# Altium PCB car_template 2021V3.PcbDoc (part 1 of 2)
Units mm, origin at the board's own origin, x right, y up, seen from the top; angles counter-clockwise.
Board outline 64 x 85 mm, 4 copper layers (Top Side, Ground Plane, Power Plane, Bottom Side), stack 0.844 mm thick; 89 components, 78 nets, 327 pads, 91 vias.
Unrouted connection lines stored in the file: 10.
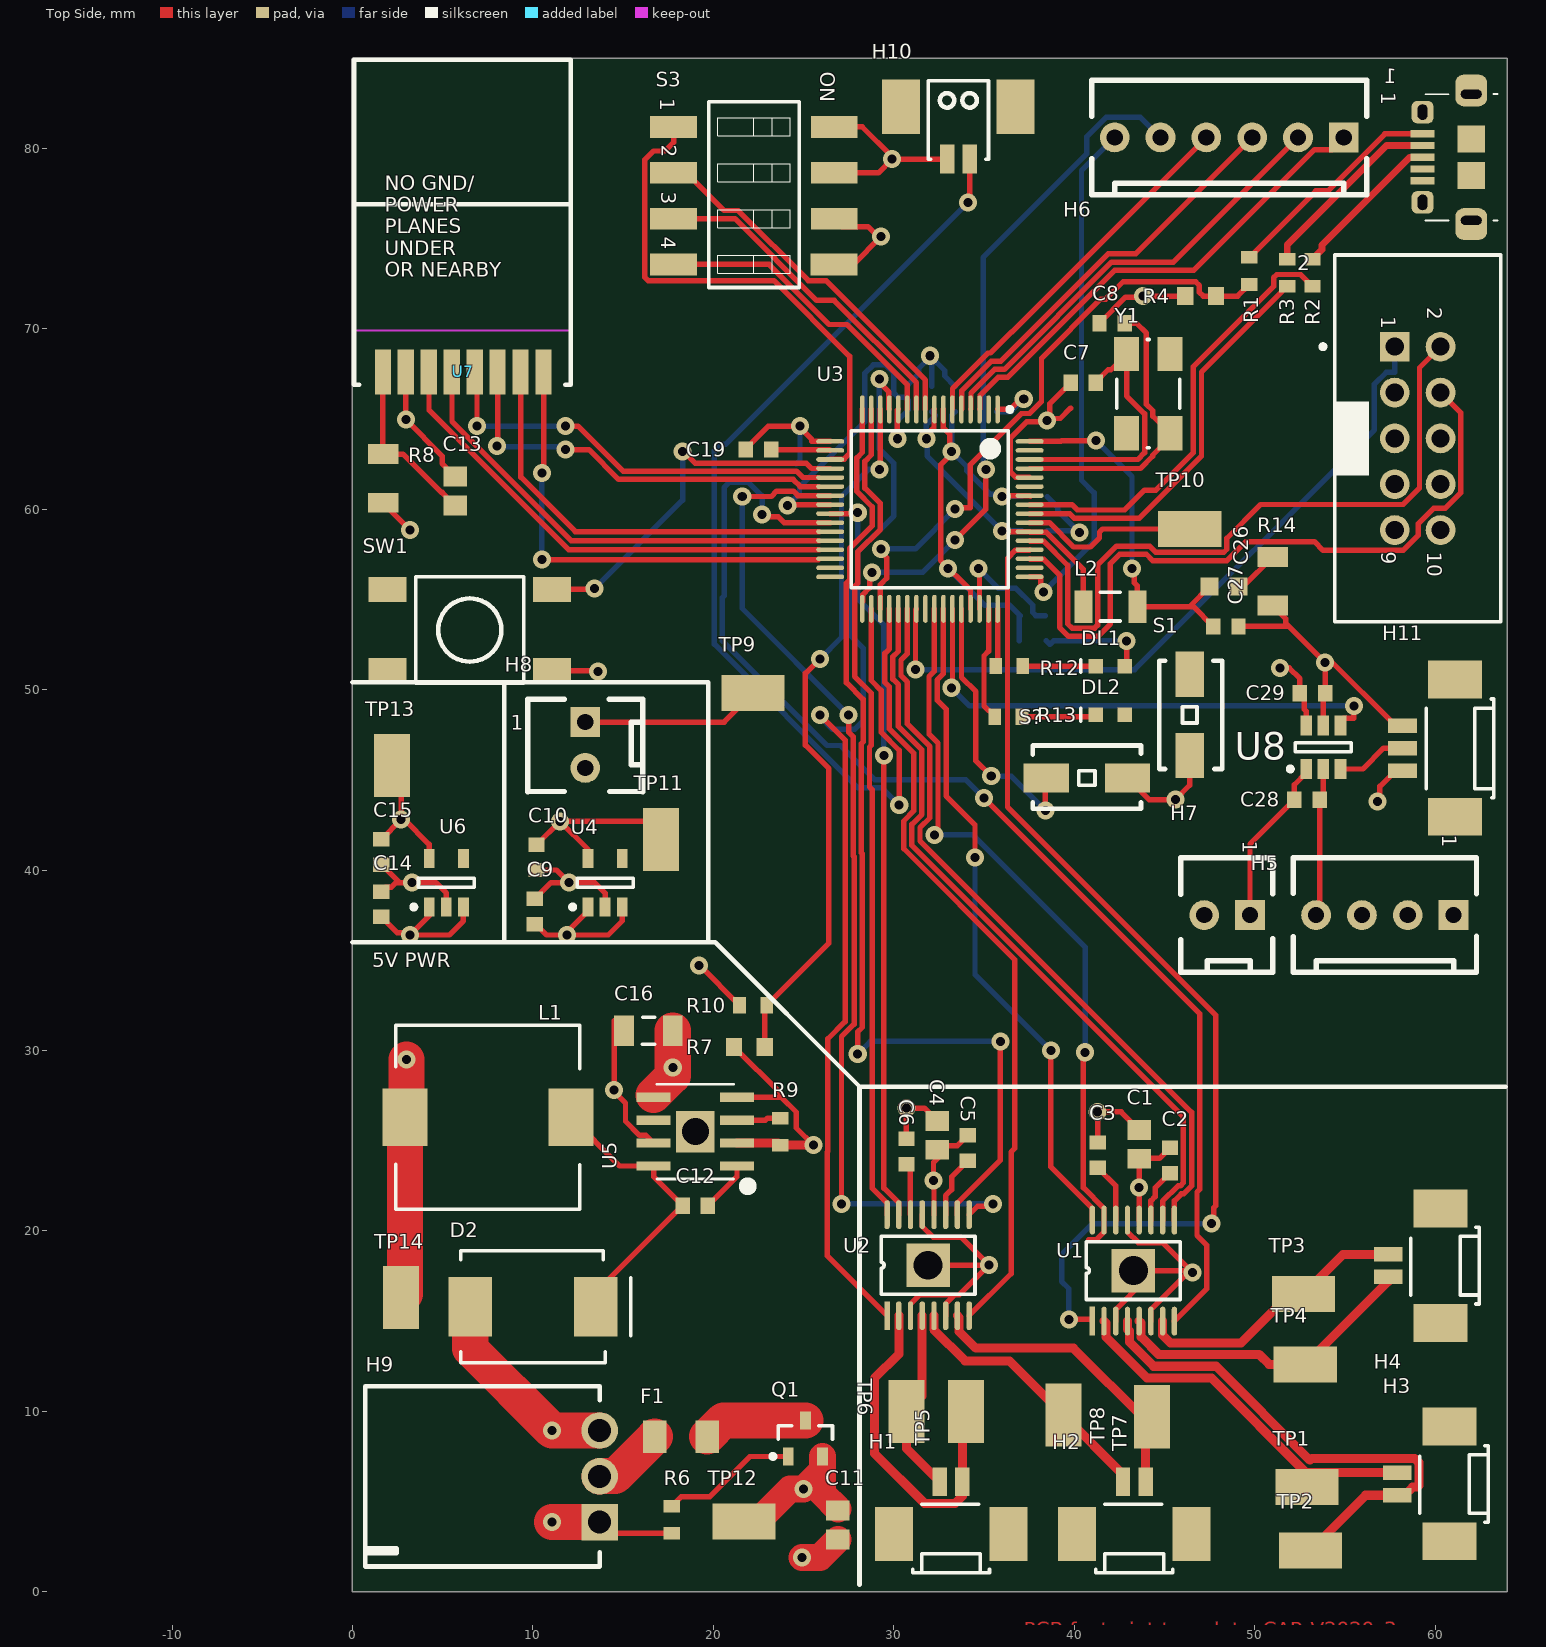
[diagram p0: Top Side view]
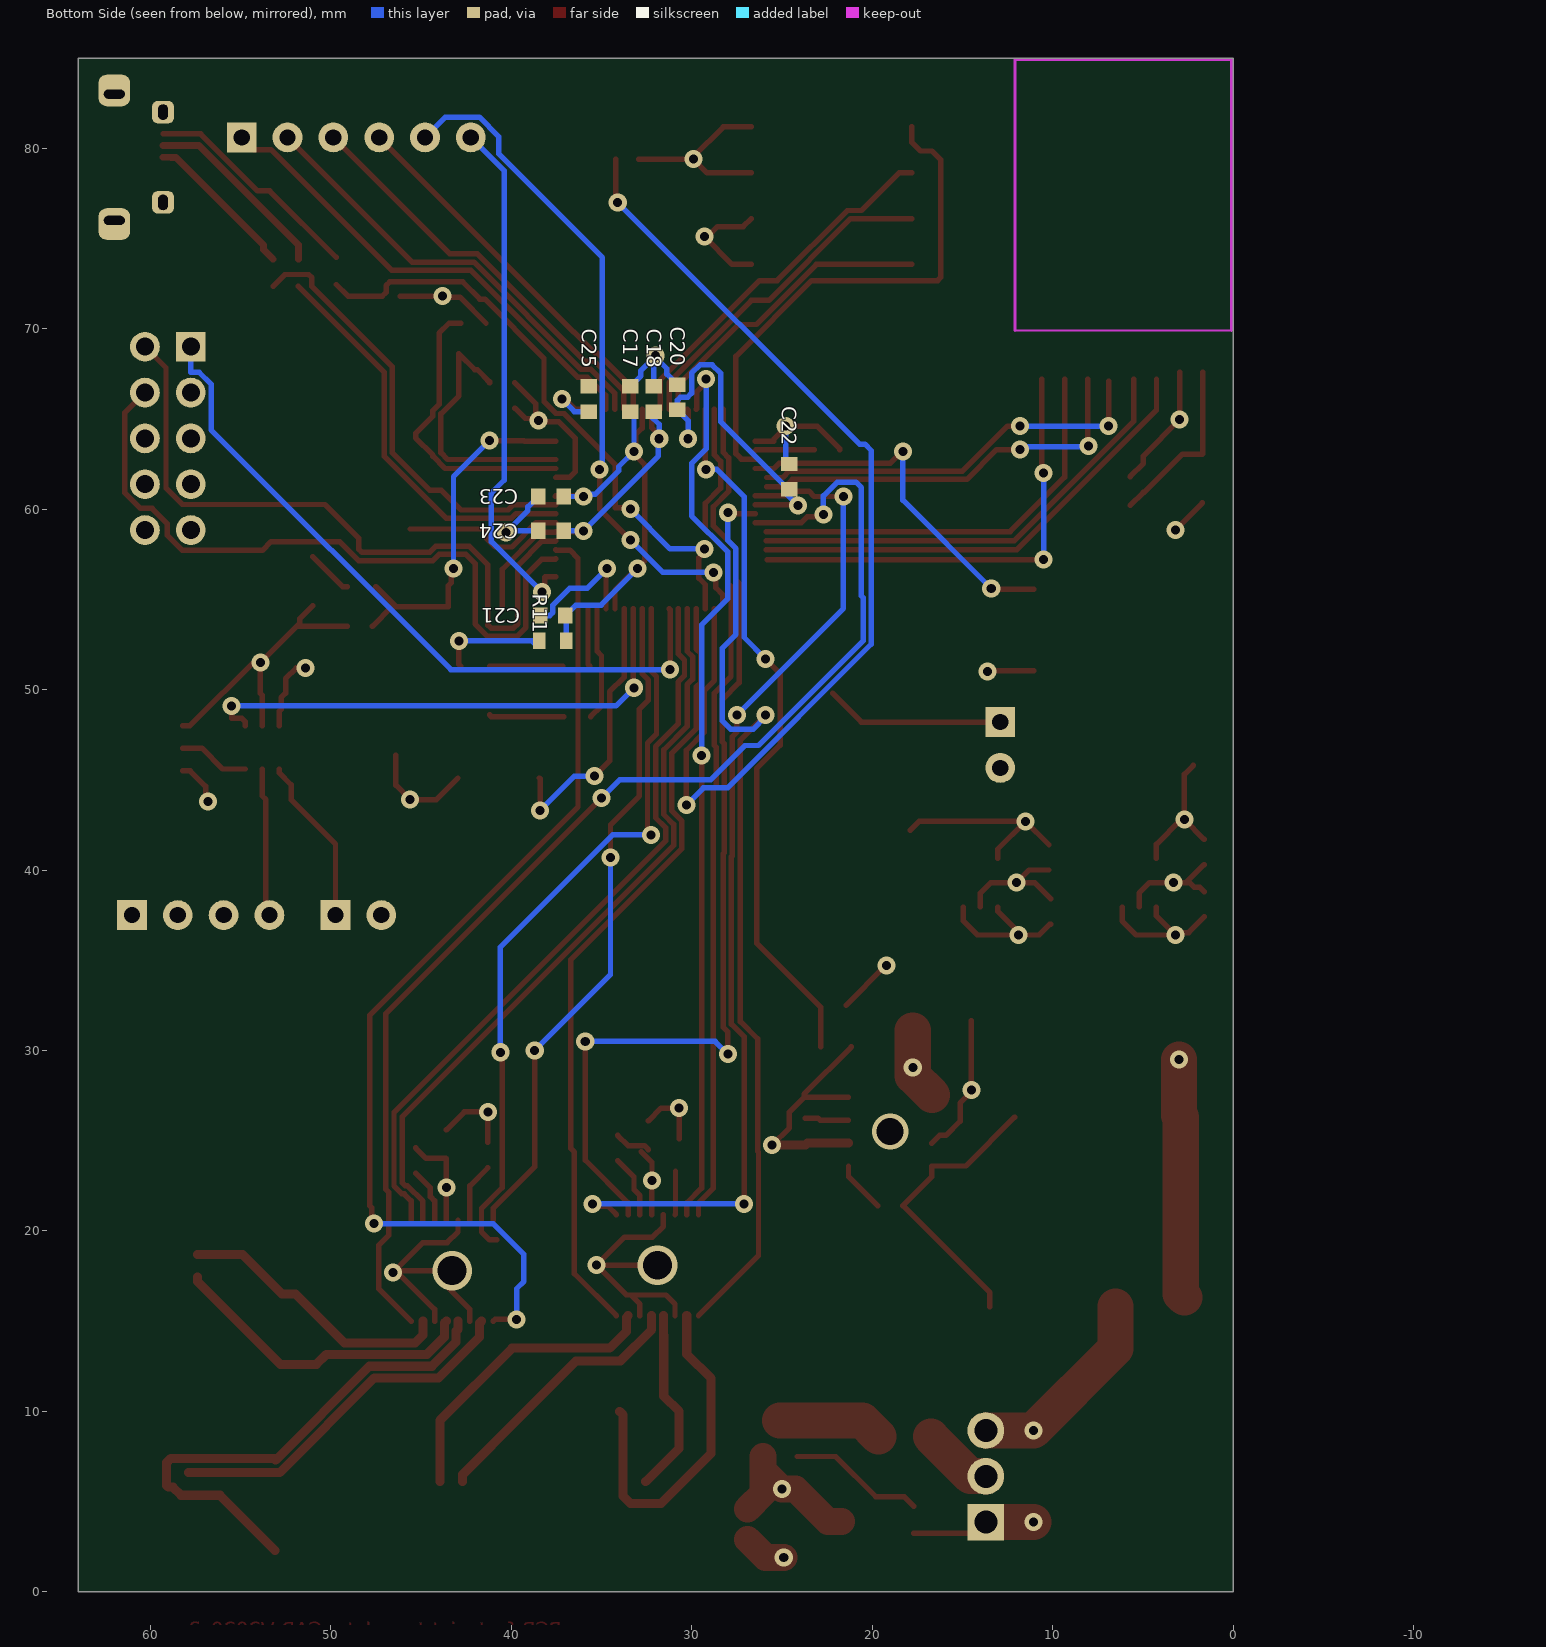
[diagram p1: Bottom Side view, seen from below]
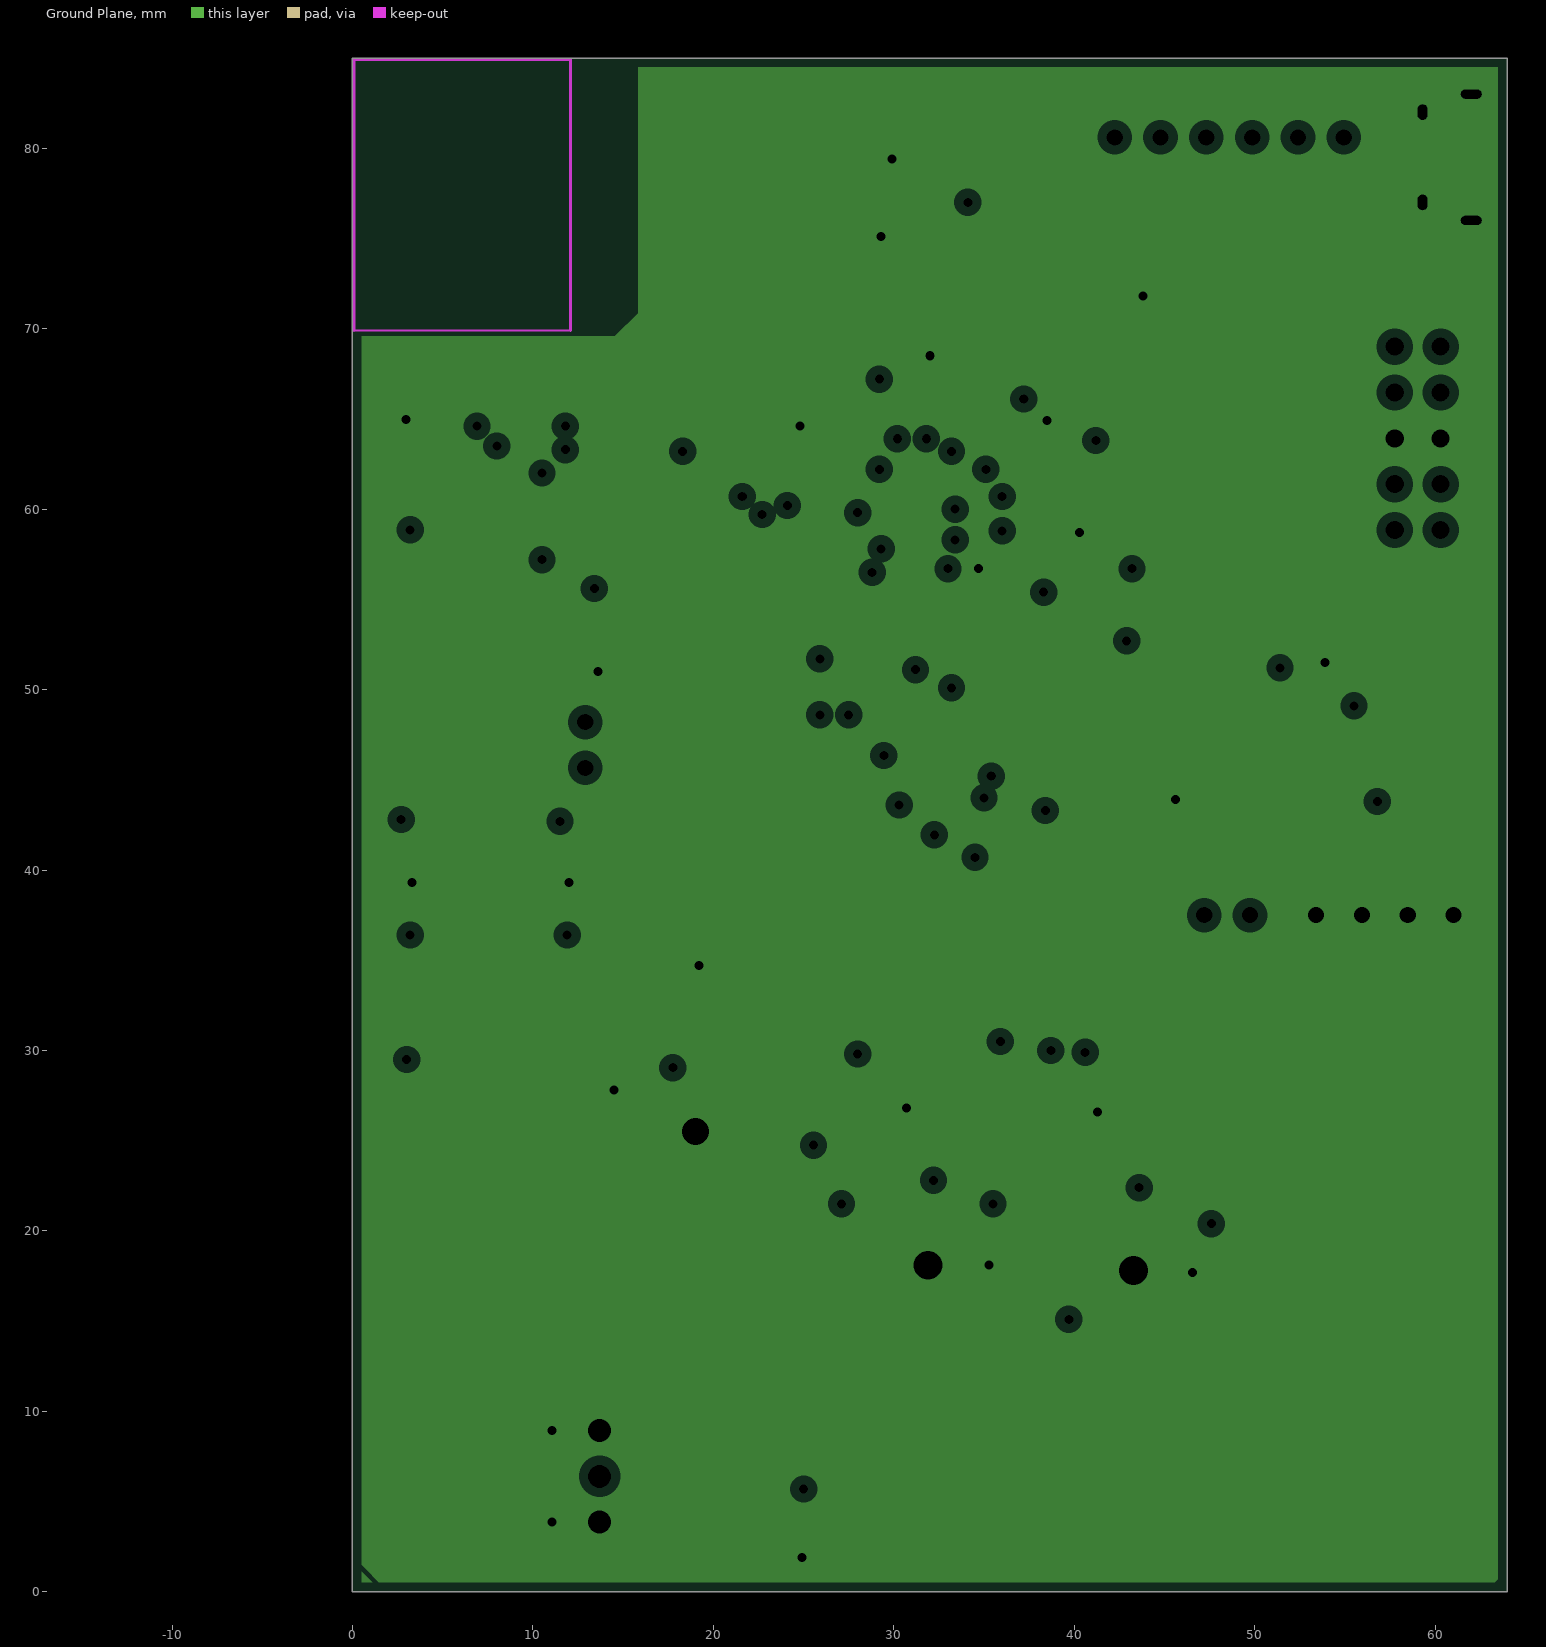
[diagram p2: Ground Plane, clearances drawn from the general rule]
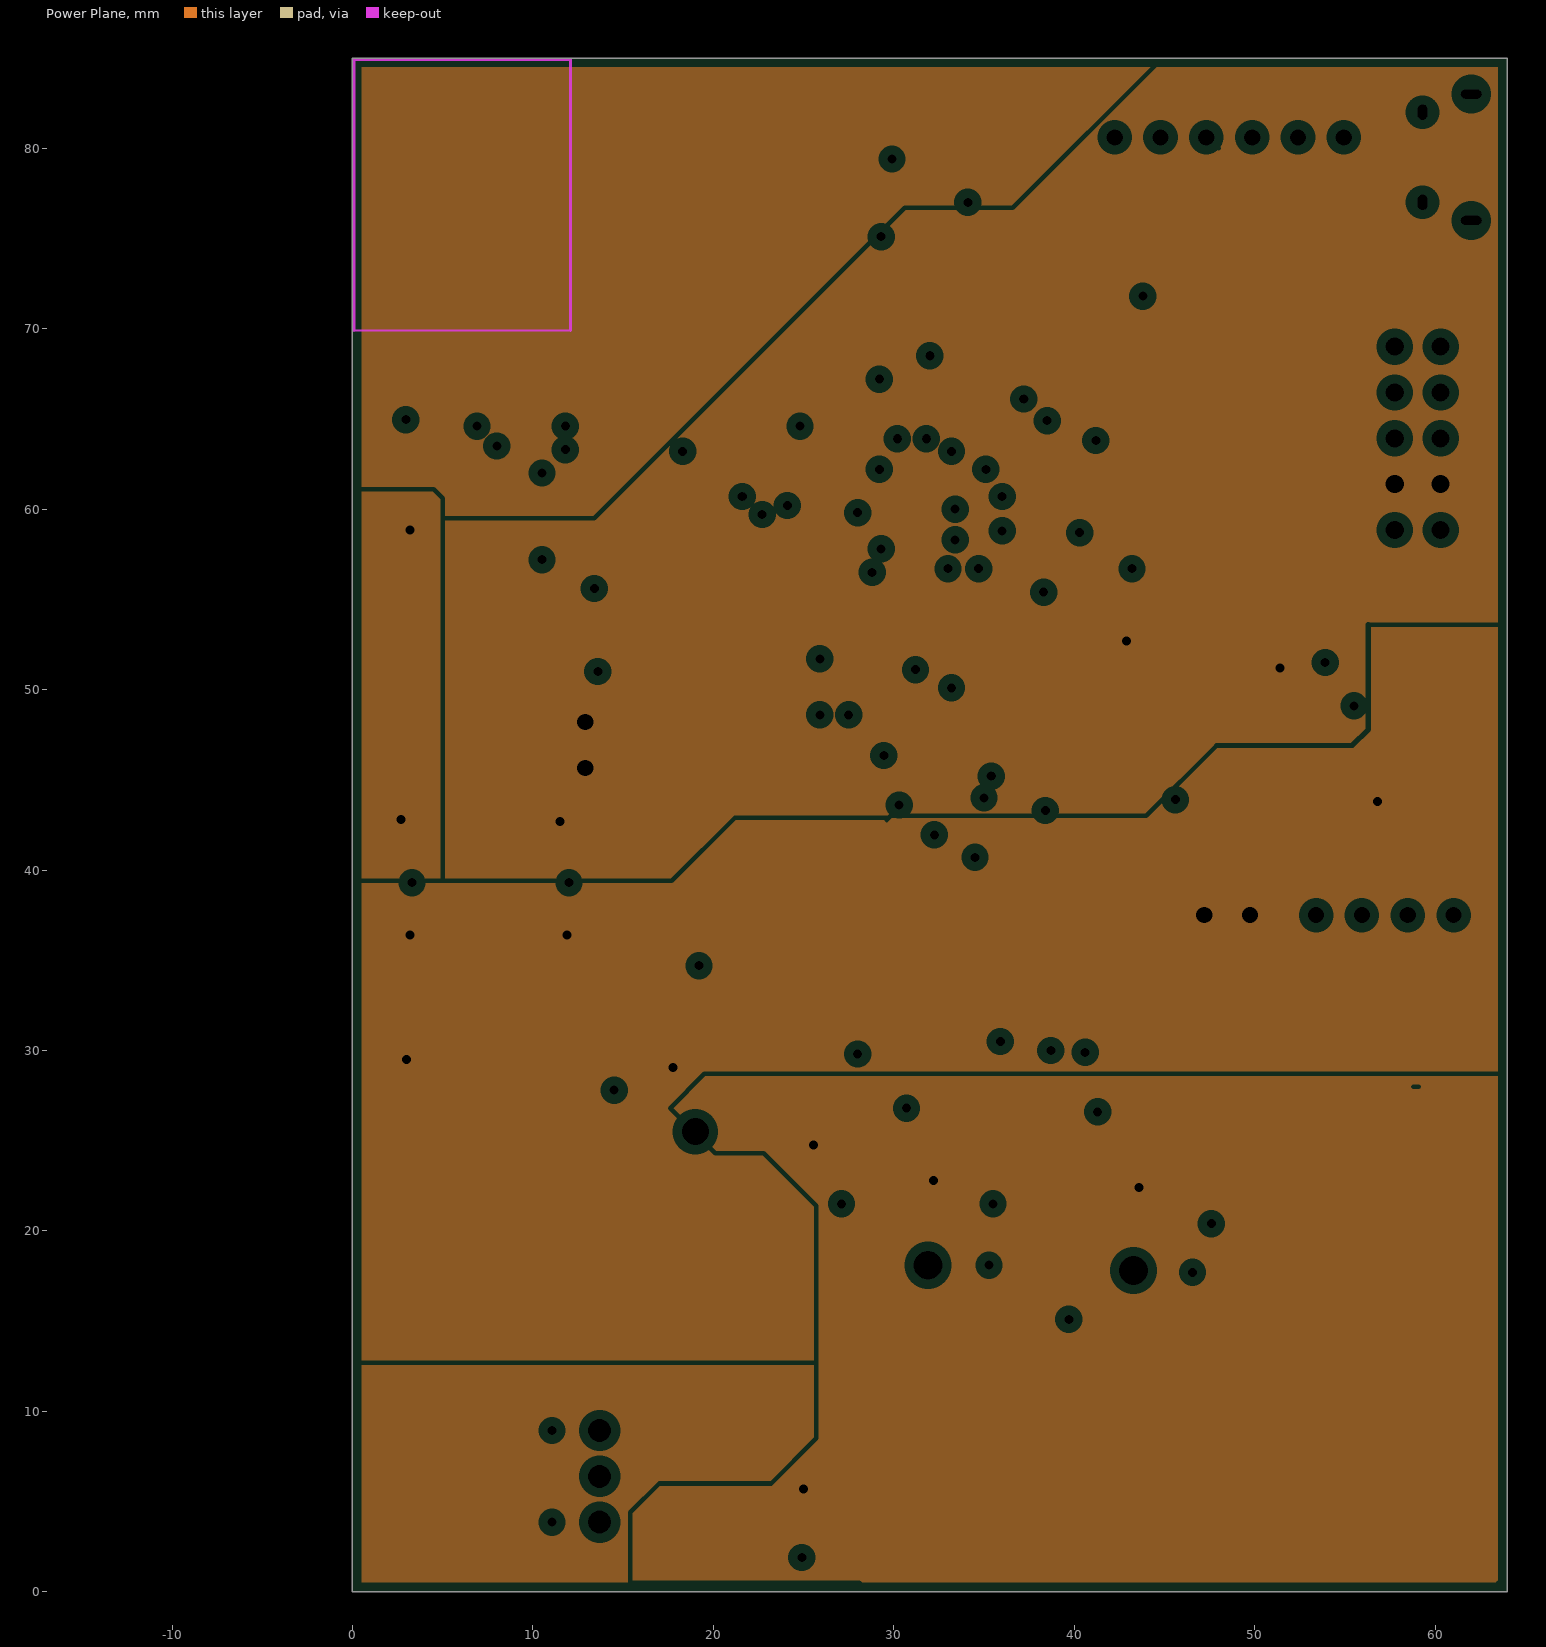
[diagram p3: Power Plane, clearances drawn from the general rule]

## Layer stack, top to bottom
Top Solder: solder mask 0.0102, Solder Resist, Dk 3.5
Top Side: signal copper 0.0356
Dielectric 1: core 0.32, FR-4, Dk 4.8
Ground Plane: plane copper 0.036, net GND
Dielectric 3: prepreg 0.127, Dk 4.2
Power Plane: plane copper 0.036, net (Multiple Nets)
Dielectric 4: core 0.254, Dk 4.2
Bottom Side: signal copper 0.0356
Bottom Solder: solder mask 0.0102, Solder Resist, Dk 3.5

## Board outline
0,85 64,85 64,0 0,0 0,85

## Design rules (kind name [scope] priority, off if disabled: settings)
BoardOutlineClearance [All] p1: gap=0.5 ignorepadtopadclearanceinfootprint=FALSE
Clearance Min_Clearance_Circuit_Labs [All] p1: gap=0.15 ignorepadtopadclearanceinfootprint=FALSE except(0: Arc-Hole Track-Hole SMDPad-Hole THPad-Hole Via-Hole Fill-Hole Poly-Hole Region-Hole Text-Hole)
DiffPairsRouting [All] p1: maxlimit=0.254 minlimit=0.254 mostfreqgap=0.254 toplayer_minwidth=0.381 toplayer_maxwidth=0.381 toplayer_prefwidth=0.381 bottomlayer_minwidth=0.381 bottomlayer_maxwidth=0.381 bottomlayer_prefwidth=0.381 maxuncoupledlength=12.7
FanoutControl Fanout_BGA [IsBGA] p1 off: bgadir=Out bgaviamode=Centered fanoutstyle=Auto fanoutdirection=Alternating viagrid=0.025 // Fanout_BGA (Default Rule)
HoleSize [All] p1: absolutevalues=TRUE maxlimit=10 minlimit=0.3 maxpercent=80.000 minpercent=20.000
MinimumAnnularRing [All] p1: minimumring=0.1
MinimumSolderMaskSliver [All] p1: minsoldermaskwidth=0.1
NetAntennae [All] p1: netantennaetolerance=1
PasteMaskExpansion [All] p1 off: expansion=0.2
PlaneClearance [All] p1: clearance=0.508
PlaneConnect [All] p1: planeconnectstyle=Relief reliefexpansion=0.508 reliefentries=4 reliefconductorwidth=0.254 reliefairgap=0.254
PolygonConnect [All] p1: connectstyle=Relief reliefconductorwidth=0.254 reliefentries=4 polygonreliefangle="90 Angle" airgapwidth=0.254
RoutingVias [All] p1: holewidth=0.5 width=1 viastyle="Through Hole" minholewidth=0.3 minwidth=0.6 maxholewidth=1 maxwidth=2
SMDNeckDown [All] p1 off: percent=50.000
SMDToCorner [All] p1: distance=98425
SMDToPlane [All] p1: distance=1968504
SilkToSolderMaskClearance SilkscreenOverComponentPads [IsPad] p1: minsilkscreentomaskgap=0.254 clearancetoexposedcopper=TRUE
SolderMaskExpansion [All] p1: expansion=0.102
ViasUnderSMD [All] p1: allowed=FALSE
Width [All] p1: maxlimit=2 minlimit=0.15 preferedwidth=0.3
21 further rules are at their usual default settings.

## Classes and differential pairs
component class MotorDriver: C1 C2 C3 C4 C5 C6 H1 H2 H3 H4 TP1 TP2 TP3 TP4 TP5 TP6 TP7 TP8 U1 U2
component class Racer: 1 2 C7 C8 C9 C10 C11 C12 C13 C14 C15 C16 C17 C18 C19 C20 C21 C22 C23 C24 C25 C26 C27 C28 C29 D2 DL1 DL2 F1 H5 H6 H7 H8 H10 H11 L1 L2 Q1 R1 R2 R3 R4 R6 R7 R8 R9 R10 R11 R12 R13 R14 S1 S3 S? SW1 TP9 TP10 TP11 TP12 TP13 TP14 U3 U4 U5 U6 U7 U8 Y1
differential pair D: +D_P -D_N

## Components (designator, comment, footprint, x,y, rotation, side; value= is the part's Value field where it differs from the comment)
1 "JS_USB_MICRO_B" FCI_USB_10118194-0001LF 63.45,79.5 r270 top
2 "Header 5X2 Vert" IDC2.54-V10D 59.03,63.92 r270 top
C1 "10uF" CAPC2012L 43.6,24.8 r270 top
C2 "10nF" CAPC1608L 45.3,23.9 r90 top
C3 "2.2uF" CAPC1608L 41.3,24.2 r270 top
C4 "10uF" CAPC2012L 32.4,25.3 r270 top
C5 "10nF" CAPC1608L 34.1,24.6 r90 top
C6 "2.2uF" CAPC1608L 30.7,24.4 r270 top
C7 "27pF" CAPC1608L 40.5,67 r0 top
C8 "27pF" CAPC1608L 42.1,70.3 r0 top
C9 "1uF" CAPC1608L 10.1,37.7 r270 top
C10 "1uF" CAPC1608L 10.2,40.7 r90 top
C11 "10uF" CAPC2012L 26.9,3.7 r90 top
C12 "100nF" CAPC1608L 19,21.4 r180 top
C13 "10uF" CAPC2012L 5.7,61 r270 top
C14 "1uF" CAPC1608L 1.6,38.1 r270 top
C15 "1uF" CAPC1608L 1.6,41 r90 top
C16 "47uF" CAPC3216L 16.4,31.1 r0 top
C17 "100nF" CAPC1608L 33.4,66.1 r270 bottom
C18 "100nF" CAPC1608L 32.1,66.1 r90 bottom
C19 "100nF" CAPC1608L 22.5,63.3 r0 top
C20 "100nF" CAPC1608L 30.8,66.2 r90 bottom
C21 "100nF" CAPC1608L 37.7,54.1 r180 bottom
C22 "100nF" CAPC1608L 24.6,61.8 r90 bottom
C23 "100nF" CAPC1608L 37.8,60.7 r180 bottom
C24 "100nF" CAPC1608L 37.8,58.8 r0 bottom
C25 "100nF" CAPC1608L 35.7,66.1 r270 bottom
C26 "4.7uF" CAPC1608N 48.3,55.7 r0 top
C27 "100nF" CAPC1608L 48.4,53.5 r180 top
C28 "100nF" CAPC1608L 52.9,43.9 r0 top
C29 "100nF" CAPC1608L 53.2,49.8 r0 top
D2 "SCHOTTKY 30V 4A" SMC 10,15.8 r0 top
DL1 "Bright Green" WL-SMCW0603 41.2,51.3 r0 top
DL2 "Blue" WL-SMCW0603 41.2,48.6 r0 top
F1 "5A" RESC3216N 18.2,8.6 r180 top
H1 "SMD 1.25mm Horiz" SD-53261-0219 32.55,6.1 r180 top
H2 "SMD 1.25mm Horiz" SD-53261-0219 42.7,6.1 r180 top
H3 "SMD 1.25mm Horiz" SD-53261-0219 57.9,5.35 r270 top
H4 "SMD 1.25mm Horiz" SD-53261-0219 57.4,17.45 r270 top
H5 "4 Pin Molex KK Hdr" MOLEX_KK_4_HDR 61.02,37.5 r180 top
H6 "6 Pin Molex KK Hdr" MOLEX_KK_6_HDR 54.94,80.6 r180 top
H7 "2 Pin Molex KK HDR" MOLEX_KK_2_HDR 49.74,37.5 r180 top
H8 "2 Pin Molex KK HDR" MOLEX_KK_2_HDR 12.9,48.2 r270 top
H9 "Battery_HEADER_3pin" BATT_HEADER_3POS 13.7,6.4 r90 top
H10 "SMD Vert 1.25mm" SD-53398-0219 34.2,79.4 r0 top
H11 "SMD Horiz 1.25mm" SD-53261-0319 58.2,45.5 r270 top
L1 "IND 5.2UH 6A" INDUCTOR5u2 7.5,26.3 r180 top
L2 "1A max, Idc 0.3R," INDC3216L 42,54.6 r180 top
Q1 "SSM3J328R,LF" SOT23_L 25.1,8.5 r90 top
R1 "27K" RESC1608L 49.7,73.2 r90 top
R2 "27R" RESC1608L 53.2,73.1 r270 top
R3 "27R" RESC1608L 51.8,73.1 r270 top
R4 "47K" RESC1608N 47,71.8 r0 top
R6 "100K" RESC1608L 17.7,4 r90 top
R7 "47K" RESC1608N 22,30.2 r0 top
R8 "1R" RESC3216L 1.7,61.7 r270 top
R9 "100K" RESC1608L 23.7,25.5 r270 top
R10 "33K" RESC1608L 22.2,32.5 r180 top
R11 "0R" RESC1608L 37.7,52.7 r0 bottom
R12 "330R" RESC1608L 36.4,51.3 r180 top
R13 "330R" RESC1608L 36.35,48.5 r180 top
R14 "1R" RESC3216L 51,56 r270 top
S1 "EVQPNF05M" EVQPNF05M 46.4,48.6 r270 top
S3 "WS_SW DIP-4" "DIP_SW_4WAY_SMD -" 17.8,81.18 r270 top
S? "EVQPNF05M" EVQPNF05M 40.7,45.1 r0 top
SW1 "FSM2JSMATR" FSM2JSMA 6.5,53.3 r90 top
TP1 "A_OUT1" TP_1206 52.9,5.8 r180 top value=TP
TP2 "A_OUT2" TP_1206 53.1,2.3 r180 top value=TP
TP3 "B_OUT1" TP_1206 52.7,16.5 r180 top value=TP
TP4 "B_OUT2" TP_1206 52.8,12.6 r180 top value=TP
TP5 "R_OUT2" TP_1206 34,10 r90 top value=TP
TP6 "R_OUT1" TP_1206 30.7,10 r270 top value=TP
TP7 "L_OUT1" TP_1206 44.3,9.7 r90 top value=TP
TP8 "L_OUT2" TP_1206 39.4,9.8 r90 top value=TP
TP9 "3V3" TP_1206 22.2,49.8 r0 top value=TP
TP10 "Erase" TP_1206 46.4,58.9 r180 top value=TP
TP11 "TP" TP_1206 17.1,41.7 r90 top
TP12 "TP" TP_1206 21.7,3.9 r180 top
TP13 "TP" TP_1206 2.2,45.8 r90 top
TP14 "TP" TP_1206 2.7,16.3 r90 top
U1 "DRV8833" HTSOP16#1 41,15 r90 top locked
U2 "DRV8833" HTSOP16#2 29.625,15.3 r90 top
U3 "ATSAM4S8BA-ANR" LQFP64_L 32,60 r270 top locked
U4 "CAT6219-330TDGT3" SOT95P280X145-5N 14,39.3 r90 top
U5 "ADP2302ARDZ-5.0 BUCK" RD_8_1 19,25.5 r180 top locked value=Value
U6 "CAT6219-330TDGT3" SOT95P280X145-5N 5.2,39.3 r90 top
U7 "nRF24 SMD" NRF24 0.086,66.9 r0 top
U8 "SN74LVC1T45" SOT23-6_N 53.8,46.8 r90 top
Y1 "12MHz" 6.0X3.5-4 44.1,66.4 r90 top

## Footprints (in the part's own frame and the unit in brackets; to place one, negate y for a bottom-side part, rotate by r counter-clockwise, add the part's x,y. Pads: shape width x height; smd on the part's side, far side on the other; paste and mask are expansions set on the pad)
6.0X3.5-4 [mm] "4 SMD 6.0X3.5 mm No Lead Crystal"
  rect 1.9x1.4 smd: 1(-2.2,-1.2) 2(2.2,-1.2) 3(2.2,1.2) 4(-2.2,1.2)
  silkscreen extent -3,-1.75 3,1.75, body extent -3,-1.75 3,1.75, height 1.2
BATT_HEADER_3POS [mil]
  rect 80x80 hole 50: 1(-100,0)
  round 80 hole 50: 2(0,0) 3(100,0)
  silkscreen extent -197,0 197,512
CAPC1608L [mm] "Chip Capacitor, Body 1.6x0.8mm, IPC High Density"
  rect 0.8x0.9 smd: 1(-0.7,0) 2(0.7,0)
  body extent -0.87,-0.48 0.87,0.48, height 0.85
CAPC1608N [mm] "Chip Capacitor, Body 1.6x0.8mm, IPC Medium Density"
  rect 1x1 smd: 1(-0.8,0) 2(0.8,0)
  body extent -0.87,-0.48 0.87,0.48, height 0.85
CAPC2012L [mm] "Chip Capacitor, Body 2.0x1.3mm, IPC High Density"
  rect 1.1x1.3 smd: 1(-0.8,0) 2(0.8,0)
  body extent -1.1,-0.72 1.1,0.72, height 1.1
CAPC3216L [mm] "Chip Capacitor, Body 3.2x1.6mm, IPC High Density"
  rect 1.1x1.7 smd: 1(-1.35,0) 2(1.35,0)
  silkscreen extent -0.35,-0.75 0.35,0.75, body extent -1.7,-0.9 1.7,0.9, height 1.35
"DIP_SW_4WAY_SMD -" [mm] "DIP Switch; 8 Leads"
  rect 1.2x2.6 smd: 1(0,0) 2(2.54,0) 3(5.08,0) 4(7.62,0) 5(7.62,8.89) 6(5.08,8.9) 7(2.54,8.9) 8(0,8.9)
  silkscreen extent -1.4,1.95 8.9,6.95
EVQPNF05M [mm] "Panansonic light touch SMD push button switch"
  rect 2.5x1.6 smd: 1(-2.25,0) 2(2.25,0)
  silkscreen extent -3,-1.7 3,1.8, body extent -3,-1.7 3,1.8, height 5
FCI_USB_10118194-0001LF [mm] "Micro USB B Type Receptacle"
  rect 0.4x1.35 smd mask+0.07: 1(-1.3,-4.15) 2(-0.65,-4.15) 3(0,-4.15) 4(0.65,-4.15) 5(1.3,-4.15)
  rrect50% 1.75x1.75 hole 0.5 slot 1.15 at 90 deg copper offset -0.2,0 paste+0 mask+0.1: 6(-3.5,-1.45)
  rrect50% 1.25x1.2 hole 0.55 slot 0.85 at 0 deg: 6(-2.5,-4.15) 6(2.5,-4.15)
  rect 1.5x1.55 smd: 6(-1,-1.45) 6(1,-1.45)
  rrect50% 1.75x1.75 hole 0.5 slot 1.15 at 90 deg copper offset 0.2,0 paste+0 mask+0.1: 6(3.5,-1.45)
  silkscreen extent -3.5,-4 3.5,0
FSM2JSMA [mm] "6 X 6 mm Switch"
  rect 1.4x2.1 smd: 1(2.25,4.55) 2(2.25,-4.55) 3(-2.25,4.55) 4(-2.25,-4.55)
  silkscreen extent -2.95,-3 2.95,3, body extent -2.95,-3 2.95,3, height 7
HTSOP16#1 [mm]
  rect 1.6x0.3 smd: 1(0,0)
  oval 1.6x0.3 smd: 2(0,-0.65) 3(0,-1.3) 4(0,-1.95) 5(0,-2.6) 6(0,-3.25) 7(0,-3.9) 8(0,-4.55) 9(5.6,-4.55) 10(5.6,-3.9) 11(5.6,-3.25) 12(5.6,-2.6) 13(5.6,-1.95) 14(5.6,-1.3) 15(5.6,-0.65) 16(5.6,0)
  rect 2.4x2.4 smd paste-0.5: 17(2.8,-2.275)
  silkscreen extent 1.2,-4.88 4.4,0.33
HTSOP16#2 [mm]
  rect 1.6x0.3 smd: 1(0,0)
  oval 1.6x0.3 smd: 2(0,-0.65) 3(0,-1.3) 4(0,-1.95) 5(0,-2.6) 6(0,-3.25) 7(0,-3.9) 8(0,-4.55) 9(5.6,-4.55) 10(5.6,-3.9) 11(5.6,-3.25) 12(5.6,-2.6) 13(5.6,-1.95) 14(5.6,-1.3) 15(5.6,-0.65) 16(5.6,0)
  rect 2.4x2.4 smd: 17(2.8,-2.275)
  silkscreen extent 1.2,-4.88 4.4,0.33
IDC2.54-V10D [mm] "Connector; IDC, Low Profile Male Header, Thru-Hole; 10 Position; Vertical; Pitch 2.54 mm; Body 20.32 x 9.2 x 9.45 mm (LxWxH)"
  rect 1.65x1.65 hole 1: 1(-5.08,-1.27)
  round 1.65 hole 1: 2(-5.08,1.27) 3(-2.54,-1.27) 4(-2.54,1.27) 5(0,-1.27) 6(0,1.27) 7(2.54,-1.27) 8(2.54,1.27) 9(5.08,-1.27) 10(5.08,1.27)
  silkscreen extent -10.16,-5.37 10.16,4.6, body extent -10.16,-4.6 10.16,4.6, height 9.45
INDC3216L [mm] "Chip Inductor, Body 3.2x1.6mm, IPC High Density"
  rect 1x1.8 smd: 1(-1.5,0) 2(1.5,0)
  silkscreen extent -0.55,-0.8 0.55,0.8, body extent -1.75,-0.95 1.75,0.95, height 1.9
INDUCTOR5u2 [mm]
  rect 2.5x3.2 smd: 1(-4.6,0) 2(4.6,0)
  silkscreen extent -5.1,-5.1 5.1,5.1
LQFP64_L [mm] "Thin QFP, 64-Leads, Body 10x10mm, Pitch 0.5mm, IPC High Density"
  oval 1.55x0.25 smd mask+0.07: 1(-5.525,3.75) 2(-5.525,3.25) 3(-5.525,2.75) 4(-5.525,2.25) 5(-5.525,1.75) 6(-5.525,1.25) 7(-5.525,0.75) 8(-5.525,0.25) 9(-5.525,-0.25) 10(-5.525,-0.75) 11(-5.525,-1.25) 12(-5.525,-1.75) 13(-5.525,-2.25) 14(-5.525,-2.75) 15(-5.525,-3.25) 16(-5.525,-3.75) 33(5.525,-3.75) 34(5.525,-3.25) 35(5.525,-2.75) 36(5.525,-2.25) 37(5.525,-1.75) 38(5.525,-1.25) 39(5.525,-0.75) 40(5.525,-0.25) 41(5.525,0.25) 42(5.525,0.75) 43(5.525,1.25) 44(5.525,1.75) 45(5.525,2.25) 46(5.525,2.75) 47(5.525,3.25) 48(5.525,3.75)
  oval 0.25x1.55 smd mask+0.07: 17(-3.75,-5.525) 18(-3.25,-5.525) 19(-2.75,-5.525) 20(-2.25,-5.525) 21(-1.75,-5.525) 22(-1.25,-5.525) 23(-0.75,-5.525) 24(-0.25,-5.525) 25(0.25,-5.525) 26(0.75,-5.525) 27(1.25,-5.525) 28(1.75,-5.525) 29(2.25,-5.525) 30(2.75,-5.525) 31(3.25,-5.525) 32(3.75,-5.525) 49(3.75,5.525) 50(3.25,5.525) 51(2.75,5.525) 52(2.25,5.525) 53(1.75,5.525) 54(1.25,5.525) 55(0.75,5.525) 56(0.25,5.525) 57(-0.25,5.525) 58(-0.75,5.525) 59(-1.25,5.525) 60(-1.75,5.525) 61(-2.25,5.525) 62(-2.75,5.525) 63(-3.25,5.525) 64(-3.75,5.525)
  silkscreen extent -5.65,-4.35 4.35,4.55, body extent -5,-5 5,5, height 1.6
MOLEX_KK_2_HDR [mil] "MOLEX_KK_2_HDR"
  rect 65x65 hole 35.43: 1(0,0)
  round 65 hole 35.43: 2(100,0)
  silkscreen extent -50,-125 152,125, body extent -44,-121 146,119, height 630
MOLEX_KK_4_HDR [mil] "MOLEX_KK_4_HDR"
  rect 65x65 hole 35.43: 1(0,0)
  round 65 hole 35.43: 2(100,0) 3(200,0) 4(300,0)
  silkscreen extent -50,-125 350,125, body extent -44,-119 343,119, height 630
MOLEX_KK_6_HDR [mil] "MOLEX_KK_6_HDR"
  rect 65x65 hole 35.43: 1(0,0)
  round 65 hole 35.43: 2(100,0) 3(200,0) 4(300,0) 5(400,0) 6(500,0)
  silkscreen extent -50,-125 550,125, body extent -44,-119 543,119, height 630
NRF24 [mm]
  rect 0.9x2.5 smd: 1(1.6,0.7) 2(2.871,0.7) 3(4.143,0.7) 4(5.414,0.7) 5(6.686,0.7) 6(7.957,0.7) 7(9.229,0.7) 8(10.5,0.7)
  Keep-Out Layer lines w0.1: 0,3 12,3
  Keep-Out Layer lines w0.15: 0,3 0,18 12,18 12,3
  silkscreen extent 0,0 12,18
RD_8_1 [mil]
  rect 74x20 smd paste+0 mask+0: 1(-91,75) 2(-91,25) 3(-91,-25) 4(-91,-75) 5(91,-75) 6(91,-25) 7(91,25) 8(91,75)
  rect 84.65x90 smd paste-44.5 mask+0: EPAD(0,0)
  silkscreen extent -118,-104 84,123, body extent 0,0 10,10, height 10
RESC1608L [mm] "Chip Resistor, Body 1.6x0.8mm, IPC High Density"
  rect 0.7x0.9 smd: 1(-0.75,0) 2(0.75,0)
  body extent -0.85,-0.48 0.85,0.48, height 0.9
RESC1608N [mm] "Chip Resistor, Body 1.6x0.8mm, IPC Medium Density"
  rect 0.9x1 smd: 1(-0.85,0) 2(0.85,0)
  body extent -0.85,-0.48 0.85,0.48, height 0.6
RESC3216L [mm] "Chip Resistor, Body 3.1x1.6mm, IPC High Density"
  rect 1.1x1.7 smd: 1(-1.35,0) 2(1.35,0)
  body extent -1.68,-0.87 1.68,0.87, height 2.54
RESC3216N [mm] "Chip Resistor, Body 3.2x1.6mm, IPC Medium Density"
  rect 1.3x1.8 smd: 1(-1.45,0) 2(1.45,0)
  body extent -1.68,-0.87 1.68,0.87, height 0.71
SD-53261-0219 [mm] "Molex Pico Blade 2 Pos Horiz SMD Header"
  rect 0.8x1.6 smd: 1(0,0) 2(-1.25,0)
  rect 2.1x3 smd: M(-3.8,2.9) M(2.55,2.9)
  silkscreen extent -2.75,1.25 1.5,5.05, body extent -2.66,1.13 1.41,4.95, height 3.45
SD-53261-0319 [mm] "Molex Pico Blade 3 Pos Horiz SMD Header"
  rect 0.8x1.6 smd: 1(0,0) 2(-1.25,0)
  rect 0.81x1.6 smd: 3(-2.5,0)
  rect 2.1x3 smd: M(-5.05,2.9) M(2.55,2.9)
  silkscreen extent -3.98,1.3 1.5,5.05, body extent -3.88,1.13 1.4,4.94, height 3.45
SD-53398-0219 [mm] "Molex Pico Blade 2 Pos Vert SMD Header"
  rect 0.8x1.6 smd: 1(0,0) 2(-1.25,0)
  rect 2.1x3 smd: M(-3.8,2.9) M(2.55,2.9)
  silkscreen extent -2.3,0 1.05,4.35, body extent -2.48,0.1 1.28,4.24, height 4.75
SMC [mm] "DO-214-AB/SMC; 2 C-Bend Leads; Body 7.9 x 5.9 mm, inc. leads (LxW)"
  rect 2.4x3.3 smd: 1(-3.475,0) 2(3.475,0)
  silkscreen extent -4,-3.1 5.43,3.1
SOT23-6_N [mm]
  rect 1.1x0.65 smd: 1(-1.2,0.95) 2(-1.2,0) 3(-1.2,-0.95) 4(1.2,-0.95) 5(1.2,0) 6(1.2,0.95)
  silkscreen extent -1.32,-1.55 0.25,1.95, body extent -0.9,-1.55 0.9,1.55, height 1.45
SOT23_L [mm] "SOT23, 3-Leads, Body 2.9x1.3mm, Pitch 0.95mm, Lead Span 2.3mm, IPC High Density"
  rect 1x0.6 smd: 1(-1,0.95) 2(-1,-0.95) 3(1,0)
  silkscreen extent -1.12,-1.5 0.7,1.92, body extent -0.7,-1.5 0.7,1.5, height 1.1
SOT95P280X145-5N [mm] "SOT23, 5-Leads, Body 2.90x2.80mm, Pitch 0.95mm, IPC Medium Density"
  rect 1.05x0.6 smd: 1(-1.35,0.95) 2(-1.35,0) 3(-1.35,-0.95) 4(1.35,-0.95) 5(1.35,0.95)
  silkscreen extent -1.47,-1.55 0.25,1.92, body extent -0.87,-1.52 0.87,1.53, height 1.45
TP_1206 [mm] "Test Point Pad"
  rect 3.5x2 smd: 1(0,0)
  body extent -1.62,-0.85 1.63,0.8, height 2
WL-SMCW0603 [mm] "2.4 x 0.8 x 0.7mm LED"
  rect 0.8x0.8 smd: 1(0,0) 2(1.6,0)
  silkscreen extent -0.85,-0.35 -0.85,0.35

## Part data
1: library part JS_USB_MICRO_B_SMT, "CONN USB MICRO B RECPT SMT R/A", Manufacturer=FCI, Manufacturer Part Number=10118194-0001LF, Supplier Part Number 1=609-4618-1-ND, Features="Shielded, Solder Retention", Gender=Receptacle, Mounting Type="Surface Mount, Right Angle, Horizontal", Number of Contacts=5, Specifications="USB 2.0", Supplier 1=Digi-Key
2: library part JA_HDR_IDC_5X2_VERT, "IDC Header, 2,54mm, 10-Pin, Vert", Supplier Part Number 1=1096985, Storage Location="ECE Dept Store", Supplier="ECE Dept", Supplier 1=Farnell
C1 C4: library part CC_10uF_16V_0805, "CAP CER 10uF X5R 16V 0805", Manufacturer="Samsung Electro-Mechanics", Manufacturer Part Number=CL21A106KOQNNWE, Operating Temperature="-55°C ~ 85°C", Package / Case="0805 (2012 Metric)", Ratings=-, Supplier Part Number 1=1276-2894-1-ND, Temperature Coefficient=X5R, Tolerance=±10%, Applications="General Purpose", Category=Capacitors, Code_IPC=2012[0805], ComponentLink1Description=http://www.samsungsem.com/kr/support/product-search/mlcc/CL21A106KOQNNWE.jsp, ComponentLink1URL=http://www.samsungsem.com/kr/support/product-search/mlcc/CL21A106KOQNNWE.jsp, Features=-, Height - Seated (Max)=-, Lead Spacing=-, Lead Style=-, Mounting Type="Surface Mount, MLCC", Note="Footprint corresponds to dimensions for bulk cassette packaging. This case size has tightened tolerances.", Notification="Current market demand for these product types have resulted in fluctuating and extending lead times. Lead times may differ.", PackageReference=0805, Packaging="Cut Tape (CT)", Part Status=Active, Pricing 1="1=0.35, 10=0.25, 100=0.1178, 500=0.08254, 1000=0.06831 (NZD)", RoHS="RoHS Compliant", Size / Dimension="0.079\" L x 0.049\" W (2.00mm x 1.25mm)", Stock 1=20000, Supplier 1=Digi-Key, Thickness (Max)="0.055\" (1.40mm)"
C2 C5: library part CC_10nF_0603, "CAP CER 10nF X7R +-10% 50V 0603", Code_IPC="1608 [0603]", PackageReference=0603, Storage Location="PCB Assembly WS", Supplier="ECE Dept"
C3 C6: library part CC_2.2uF_0603, "CAP CER 2.2uF X5R +-20% 10V 0603", Code_IPC="1608 [0603]", PackageReference=0603, Storage Location="PCB Assembly WS", Supplier="ECE Dept"
C7 C8: library part CC_27pF_0603, "CAP CER 27pF NPO/COG +-5% 50V 0603", Code_IPC="1608 [0603]", PackageReference=0603, Storage Location="PCB Assembly WS", Supplier="ECE Dept"
C9 C10 C14 C15: library part CC_1uF_0603, "CAP CER 1uF Y5V -20% +80% 16V 0603", Max Voltage=16V, Code_IPC="1608 [0603]", PackageReference=0603, Storage Location="PCB Assembly WS", Supplier="ECE Dept"
C11 C13: library part CC_10uF_16V_0805, "CAP CER 10uF X5R 16V 0805", Manufacturer="Samsung Electro-Mechanics", Manufacturer Part Number=CL21A106KOQNNWE, Max Voltage=16V, Operating Temperature="-55°C ~ 85°C", Package / Case="0805 (2012 Metric)", Ratings=-, Supplier Part Number 1=1276-2894-1-ND, Temperature Coefficient=X5R, Tolerance=±10%, Applications="General Purpose", Category=Capacitors, Code_IPC=2012[0805], ComponentLink1Description=http://www.samsungsem.com/kr/support/product-search/mlcc/CL21A106KOQNNWE.jsp, ComponentLink1URL=http://www.samsungsem.com/kr/support/product-search/mlcc/CL21A106KOQNNWE.jsp, Features=-, Height - Seated (Max)=-, Lead Spacing=-, Lead Style=-, Mounting Type="Surface Mount, MLCC", Note="Footprint corresponds to dimensions for bulk cassette packaging. This case size has tightened tolerances.", Notification="Current market demand for these product types have resulted in fluctuating and extending lead times. Lead times may differ.", PackageReference=0805, Packaging="Cut Tape (CT)", Part Status=Active, Pricing 1="1=0.35, 10=0.25, 100=0.1178, 500=0.08254, 1000=0.06831 (NZD)", RoHS="RoHS Compliant", Size / Dimension="0.079\" L x 0.049\" W (2.00mm x 1.25mm)", Stock 1=20000, Supplier 1=Digi-Key, Thickness (Max)="0.055\" (1.40mm)", Voltage - Rated=16V
C12 C17 C18 C19 C20 C21 C22 C23 C24 C25 C27 C28 C29: library part CC_100nF_0603, "CAP CER 100nF X7R +-10% 50V 0603", Code_IPC="1608 [0603]", PackageReference=0603, Storage Location="PCB Assembly WS", Supplier="ECE Dept"
C16: library part CC_47uF_1206, "CAP CER 47uF X5R -/+20% 6V 1206", Dielectric=X5R, Max Voltage=6V, MoV=6V, Storage Location="PCB Assembly WS", Supplier="ECE Dept"
C26: library part CC_4.7uF_0603, "CAP CER 4.7uF X5R +-20%  10V 0603", Max Voltage=10V, Code_IPC=2012[0805], Note="Footprint corresponds to dimensions for bulk cassette packaging. This case size has tightened tolerances.", PackageReference=0805, Storage Location="PCB Assembly WS", Supplier="ECE Dept"
D2: library part MBRS330T3G, "DIODE SCHOTTKY 30V 4A SMC", Base Part Number=MBRS330, Capacitance @ Vr, F=-, Current - Average Rectified (Io)=4A, Manufacturer="ON Semiconductor", Operating Temperature - Junction="-65°C ~ 150°C", Package / Case="DO-214AB, SMC", Supplier Device Package=SMC, Supplier Part Number 1=MBRS330T3GOSCT-ND, Category="Discrete Semiconductor Products", ComponentLink1Description=http://www.onsemi.com/pub/Collateral/MBRS340T3-D.PDF, ComponentLink1URL=http://www.onsemi.com/pub/Collateral/MBRS340T3-D.PDF, Diode Type=Schottky, Manufacturer Part Number=MBRS330T3G, Mounting Type="Surface Mount", Packaging="Cut Tape (CT)", Part Status=Active, Pricing 1="1=0.93, 10=0.79, 100=0.5902, 500=0.46368, 1000=0.35829 (NZD)", RoHS="RoHS Compliant", Speed="Fast Recovery =< 500ns, > 200mA (Io)", Stock 1=8919, Supplier 1=Digi-Key
DL1: library part DL_150060VS75000, "LED Bright Green 40mcd 0603 SMD", Forward Current If=30, Forward Voltage=2, Manufacturer="WURTH ELEKTRONIK", Manufacturer Part Number=150060VS75000, Supplier Part Number 1=2322073, LED Colour="Bright Green", LED Mounting=SMD, Luminous Intensity=40, Storage Location="PCB Assembly WS", Supplier="ECE Dept", Supplier 1=Farnell, Viewing Angle=140°, Wavelength Typ=570
DL2: library part DL_150060BS75000, "LED Blue 270mcd 0603 SMD", Forward Current If=30, Forward Voltage=3.2, Manufacturer="WURTH ELEKTRONIK", Manufacturer Part Number=150060BS75000, Supplier Part Number 1=2322069, LED Colour=Blue, Luminous Intensity=270, Pricing="1=0.3844, 50=0.3252, 100=0.2957, 500=0.2365 (NZD)", Storage Location="PCB Assembly WS", Supplier="ECE Dept", Supplier 1=Farnell, Viewing Angle=120°, Wavelength Typ=470
F1: library part FS_Fuse_5.0A, "Fuse 5.0A Fast Acting 1206 SMD", Case/Package=1206, Case Code (Metric)=3216, DC Cold Resistance=19mR, Manufacturer="Bel TRP", Manufacturer Part Number=C1F5, Max Operating Temperature=125°C, Min Operating Temperature=-55°C, Supplier Part Number 1=507-1886-1-ND, Voltage Rating=125V, Voltage Rating (DC)=63V, Approvals=CE,cURus, Case Code (Imperial)=1206, ComponentLink1Description=http://www.farnell.com/datasheets/2571625.pdf, ComponentLink1URL=http://www.farnell.com/datasheets/2571625.pdf, ComponentLink2Description=http://belfuse.com/pdfs/C1F.pdf, ComponentLink2URL=http://belfuse.com/pdfs/C1F.pdf, ComponentLink3Description=http://www.mouser.com/ds/2/643/C1F-594910.pdf, ComponentLink3URL=http://www.mouser.com/ds/2/643/C1F-594910.pdf, ComponentLink4Description=https://belfuse.com/resources/StewartConnector/C1F.pdf, ComponentLink4URL=https://belfuse.com/resources/StewartConnector/C1F.pdf, Contact Plating=Nickel,Tin, Current Rating=5A, Fuse Type="Board Mount (Cartridge Style Excluded)", Length=0.126inch, Mount="Surface Mount", Number of Pins=2, Packaging="Tape and Reel", Pricing 1="1=0.32, 5=0.312, 10=0.298, 50=0.2662, 100=0.2479, 250=0.22032, 500=0.1836, 1000=0.17442 (USD)", Stock 1=725, Supplier 1=Digi-Key, Supplier 2=Element14, Supplier Part Number 2=2848595, Voltage Rating (AC)=125V, Width=0.062inch
H1 H2 H3 H4: library part JB_53261-02, "Header_Horiz_2Pos_1.25mm_125V@1A_SMT", Manufacturer=MOLEX, Manufacturer Part Number=53261-0271, Supplier Part Number 1=1125373, Voltage Rating V AC=125, Contact Termination="Surface Mount Right Angle", External Depth=4.2, External Length / Height=3.4, Gender=Header, Lead Spacing=1.25, No. of Contacts=2, Pitch Spacing=1.25, Pricing="5=0.27, 100=0.255, 250=0.245, 500=0.225, 1000=0.205 (NZD)", Series=PicoBlade, Storage Location="PCB Assembly WS", Supplier="ECE Dept", Supplier 1=Farnell, Supplier 2=Digi-Key, Supplier Part Number 2=WM7620CT-ND
H5: library part JA_MOLEX_KK_4POS, "CONN HEADER 4POS 2.54mm VERT_Thru Hole", Manufacturer=Molex, Manufacturer PN=22-23-2041, Supplier Part Number 1=9731164, Storage Location="ECE Dept Store", Supplier="ECE Dept", Supplier 1=Farnell
H6: library part JA_MOLEX_KK_6POS, "CONN HEADER 6POS 2.54mm VERT_Thru Hole", Supplier Part Number 1=1462922, Storage Location="ECE Dept Store", Supplier="ECE Dept", Supplier 1=Farnell
H7 H8: library part JA_MOLEX_KK_2POS, "CONN HEADER 2POS 2.54mm VERT_Thru Hole", Supplier Part Number 1=1462926, Storage Location="ECE Dept Store", Supplier="ECE Dept", Supplier 1=Farnell
H9: "3Pin Header 2.54mm spacing"
H10: library part JB_53398-02, "Header_Vert_2Pos_1.25mm_125V@1A_SMT", Manufacturer="Molex Inc", Manufacturer Part Number=0533980271, Supplier Part Number 1=WM7606CT-ND, Contact Type="Blade Pin", Mounting Type="Surface Mount", Number of Positions=2, Pitch="0.049\" (1.25mm)", Storage Location="PCB Assembly WS", Supplier="ECE Dept", Supplier 1=Digi-Key
H11: library part JB_53261-03, "Header_Horiz_3Pos_1.25mm_125V@1A_SMT", Manufacturer=Molex, Manufacturer Part Number=53261-0390, Supplier Part Number 1=1125359, Contact Type="Blade Pin", Mounting Type="Surface Mount, Right Angle", Number of Positions=3, Pitch="0.049\" (1.25mm)", Storage Location="PCB Assembly WS", Supplier="ECE Dept", Supplier 1=Farnell, Supplier 2=Digi-Key, Supplier Part Number 2=WM1754CT-ND
L1: library part CDRH104RNP-5R2NC, "FIXED IND 5.2UH 6A 22 MOHM SMD", Current - Saturation=5.6A, DC Resistance (DCR)="22 mOhm Max", Frequency - Self Resonant=-, Manufacturer="Sumida America Components Inc.", Operating Temperature="-40°C ~ 100°C", Package / Case=Nonstandard, Supplier Part Number 1=308-2280-1-ND, Tolerance=±30%, Category="Inductors, Coils, Chokes", ComponentLink1Description=http://products.sumida.com/products/pdf/CDRH104R.pdf, ComponentLink1URL=http://products.sumida.com/products/pdf/CDRH104R.pdf, Height - Seated (Max)="0.157\" (4.00mm)", Manufacturer Part Number=CDRH104RNP-5R2NC, Material - Core=Ferrite, Mounting Type="Surface Mount", Packaging="Cut Tape (CT)", Part Status=Active, Pricing 1="1=2.9, 10=2.678, 100=1.8743, 500=1.5173 (NZD)", Q @ Freq=-, Ratings=-, RoHS="RoHS Compliant", Shielding=Shielded, Size / Dimension="0.402\" L x 0.394\" W (10.20mm x 10.00mm)", Stock 1=3849, Supplier 1=Digi-Key, Supplier Device Package=-, Type=-
L2: library part IN_Ferrite-Bead, "Ferrite Bead, Rdc 0.3R, Z100MHZ 600R, Imax 1A, SMD 1206", DC Current Rating=1, DC Resistance Max=0.08, Ferrite Case Style="1206 ^3216 Metric]", Frequency Range="50MHz to 1", Impedance Tolerance="± 25%", Manufacturer=FAIR-RITE, Manufacturer Part Number=2512066017Y1, Supplier Part Number 1=1612060, Ferrite Mounting=SMD, Impedance=600, Manufacturer PN=2512066017Y1, Storage Location="PCB Assembly WS", Supplier="ECE Dept", Supplier 1=Farnell
Q1: library part TM_SSM3J328R, "MOSFET P-CH 20V 6A SOT23-3", Case/Package=SOT-23-3, Continuous Drain Current (ID)=6A, Drain to Source Breakdown Voltage=-20V, Drain to Source Resistance=47.4mR, Drain to Source Voltage (Vdss)=20V, Gate to Source Voltage (Vgs)=8V, Input Capacitance=840pF, Input Capacitance (Ciss) @ Vds="840pF @ 10V", Manufacturer=Toshiba, Max Operating Temperature=150°C, Max Power Dissipation=1W, Min Operating Temperature=-55°C, Package / Case="SOT-23-3 Flat Leads", Package Quantity=3000, Power Dissipation=2W, Supplier Device Package=SOT-23F, Supplier Part Number=SSM3J328RLFDKR-ND, ComponentLink1Description=https://datasheet.ciiva.com/11158/ssm3j328r-datasheet-en-20140301-11158652.pdf, ComponentLink1URL=https://datasheet.ciiva.com/11158/ssm3j328r-datasheet-en-20140301-11158652.pdf, Current - Continuous Drain (Id) @ 25° C=6A, Element Configuration=Single, FET Feature="Logic Level Gate, 1.5V Drive", FET Type="MOSFET P-Channel, Metal Oxide", Gate Charge (Qg) @ Vgs="12.8nC @ 4.5V", Manufacturer Part Number=SSM3J328R,LF, Mount="Surface Mount", Number of Channels=1, Number of Elements=1, Number of Pins=3, Packaging="Tape and Reel", Power - Max=1W, Pricing="1=0.79, 10=0.658, 25=0.5772, 100=0.4939, 250=0.42836, 500=0.36284, 1000=0.27972 (NZD)", Radiation Hardening=No, Rds On Max=29.8mR, Storage Location="PCB Assembly WS", Supplier=Digi-Key, Supplier 1=Digi-Key, Supplier Part Number 1=SSM3J328RLFDKR-ND, Turn-Off Delay Time=107ns, Turn-On Delay Time=32ns, Vgs(th) (Max) @ Id="1V @ 1mA"
R1: library part RS_27K, "RES 27K OHM 1/10W 5% 0603 SMD", Storage Location="PCB Assembly WS", Supplier="ECE Dept"
R2 R3: library part RS_27R, "RES 27 OHM 1/10W 5% 0603 SMD", Storage Location="PCB Assembly WS", Supplier="ECE Dept"
R4 R7: library part RS_47K, "RES 47.0K OHM 1/10W 5% 0603 SMD", Storage Location="PCB Assembly WS", Supplier="ECE Dept"
R6 R9: library part RS_100K, "RES 100K OHM 1/10W 5% 0603 SMD", Storage Location="PCB Assembly WS", Supplier="ECE Dept"
R8 R14: library part RT_1R, "RES 1R OHM 1/4W 5% 1206 SMD", Storage Location="PCB Assembly WS", Supplier="ECE Dept"
R10: library part RS_33K, "RES 33.0K OHM 1/10W 5% 0603 SMD", Storage Location="PCB Assembly WS", Supplier="ECE Dept"
R11: library part RS_0R0, "RES 0.0 OHM 1/10W 5% 0603 SMD", Storage Location="PCB Assembly WS", Supplier="ECE Dept"
R12 R13: library part RS_330R, "RES 330 OHM 1/10W 5% 0603 SMD", Storage Location="PCB Assembly WS", Supplier="ECE Dept"
S1 S?: library part WS_EVQPNF05M, "Panasonic 6 x 3.5mm SMD Light Touch Switch Type SMD", Manufacturer=Panasonic, Supplier Part Number 1=2079481, Manufacturer PN=EVQPNF05M, PackageDescription="6.0 x 3.5 mm", Storage Location="PCB Assembly WS", Supplier="ECE Dept", Supplier 1=Farnell, Supplier 2=Digi-Key, Supplier Part Number 2=P13598SCT-ND
S3: "DIP Switch, 4 Position, SPST SMD", Contact Current DC Max=25, Manufacturer="OMRON ELECTRONIC COMPONENTS", Manufacturer Part Number=A6SN-4101, Supplier Part Number 1=2029425, Contact Configuration=SPST, External Length / Height=12.1, No. of Switch Positions=4, Pitch Spacing=2.54, Storage Location="PCB Assembly WS", Supplier="ECE Dept", Supplier 1=Farnell
SW1: library part WS_FSM2JSMATR, "SWITCH TACTILE SPST-NO 0.05A 12V SMD", Contact Rating @ Voltage="0.05A @ 12VDC", Manufacturer="TE Connectivity", Operating Force=160gf, Supplier Part Number 1=1570392, Actuator Height off PCB, from Pins=4.30mm, Actuator Orientation="Top Actuated", Circuit=SPST-NO, Manufacturer Part Number=FSM2JSMATR, Outline="6.00mm x 6.00mm", Pricing="1=0.55, 10=0.518, 25=0.4444, 50=0.3778, 100=0.363, 250=0.32592, 500=0.31108 (NZD)", Storage Location="PCB Assembly WS", Supplier="ECE Dept", Supplier 1=Farnell, Supplier 2=Digi-Key, Supplier Part Number 2=450-1757-1-ND
TP1 TP2 TP3 TP4 TP5 TP6 TP7 TP8 TP9 TP10 TP11 TP12 TP13 TP14: library part TP_1206, "Test-Point 3.3x1.6x2.1mm SMD", Manufacturer="Harwin Inc", Manufacturer Part Number=S1751-46R, Supplier Part Number 1=952-1478-2-ND, Mounting Type="Surface Mount", Storage Location=ProtoPlace, Supplier="ECE Dept", Supplier 1=Digi-Key, Supplier 2=Farnell, Supplier Part Number 2=1826282, Type="PC Test Point"
U1 U2: "Dual H-Bridge Motor Driver 1.5A"
U3: library part SE_ATSAM4S16BA-MU, "IC MCU 32BIT 512KB FLASH 64LQFP", Manufacturer=Atmel, Package / Case=64-LQFP, Supplier Part Number 1=ATSAM4S8BA-ANRCT-ND, Voltage - Supply (Vcc/Vdd)="1.62 V ~ 3.6 V", Code_JEDEC=MO-220VMMD-3, ComponentLink1Description="Manufacturer URL", ComponentLink1URL=http://www.atmel.com/, ComponentLink2Description="SAM4S Series Datasheet", ComponentLink2URL=http://www.atmel.com/dyn/resources/prod_documents/11100.pdf, ComponentLink3Description="SAM4S Series Summary", ComponentLink3URL=http://www.atmel.com/dyn/resources/prod_documents/11100S.pdf, Connectivity="I²C, IrDA, Memory Card, SPI, SSC, UART/USART, USB", Core Processor="ARM® Cortex®-M4", Core Size=32-Bit, Data Converters="A/D 11x12b, D/A 2x12b", Manufacturer Part Number=ATSAM4S8BA-ANR, Number of I/O=47, PackageDescription="64-Pin Quad Flat No-Lead (QFN) Sawn, 9 x 9 x 1.0 mm Body, 0.5 mm Pitch, Exposed Pad", PackageReference=64PS, PackageVersion="revJ, Jul-2007", Packaging="Cut Tape (CT)", Peripherals="Brown-out Detect/Reset, DMA, POR, PWM, WDT", Program Memory Size="512KB (512K x 8)", Program Memory Type=FLASH, RAM Size="128K x 8", Speed=120MHz, Supplier 1=Digi-Key
U4 U6: library part SV_CAT6219-330TDGT3, "IC REG LIN 3.3V 500MA TSOT23-5", Base Part Number=CAT6219, Current - Output=500mA, Package / Case="SOT-23-5 Thin, TSOT-23-5", Supplier Device Package=TSOT-23-5, Supplier Part Number=CAT6219-330TDGT3CT-ND, Voltage - Input (Max)=5.5V, Voltage - Output (Min/Fixed)=3.3V, Voltage Dropout (Max)="0.5V @ 500mA", ComponentLink1Description=http://www.onsemi.com/pub/Collateral/CAT6219-D.PDF, ComponentLink1URL=http://www.onsemi.com/pub/Collateral/CAT6219-D.PDF, Manufacturer Part Number=CAT6219-330TDGT3, Supplier=Digi-Key, Supplier 1=Digi-Key
U5: library part ADP2302ARDZ-5.0-R7, "IC REG BUCK 5V 2A 8SOIC", Current - Output=2A, Frequency - Switching=700kHz, Supplier Part Number 1=ADP2302ARDZ-5.0-R7CT-ND, Voltage - Input (Max)=20V, Voltage - Output (Min/Fixed)=5V, Manufacturer_Part_Number=ADP2302ARDZ-5.0-R7, Output Type=Fixed, Supplier 1=Digi-Key, Type=DEV, Vendor="Analog Devices Inc"
U7: library part NRF24, "nRF24 SMD Module", Warning="No power planes near or under device"
U8: "1.8V - 5V level converter"
Y1: library part XT_CRYSTAL_12MHz_18pF, "CRYSTAL 12MHZ 18PF 6X3.5mm SMD", ESR (Equivalent Series Resistance)="60 Ohm", Frequency Stability=±50ppm, Frequency Tolerance=±30ppm, Load Capacitance=18pF, Manufacturer="CTS-Frequency Controls", Manufacturer Part Number=406C35D12M00000, Operating Mode=Fundamental, Operating Temperature="-20°C ~ 70°C", Package / Case="4-SMD, No Lead (DFN, LCC)", Supplier Part Number 1=CTX855CT-ND, Frequency=12MHz, Height="0.047\" (1.20mm)", Mounting Type="Surface Mount", Size / Dimension="0.236\" L x 0.138\" W (6.00mm x 3.50mm)", Supplier 1=Digi-Key

## Via types
v1: diameter 1, hole 0.5, Top Side to Bottom Side, 57 vias
v2: diameter 1, hole 0.5, Top Side to Bottom Side, tented both sides, 31 vias
v3: diameter 2.2, hole 1.6, Top Side to Bottom Side, 2 vias
v4: diameter 2, hole 1.5, Top Side to Bottom Side, 1 vias

## Nets (pads, with @x,y where several pads share a name; then routed paths per layer and width w, separated by ;. In a path a pad name is that pad's centre, name@x,y a point inside that pad or via, vN(x,y) a via of type N, cw(c..) or ccw(c..) an arc to the next point about the centre after c; other vN are vias at no path point)
3V3: 2.7 2.8 C10.2 C29.1 DL1.2 DL2.2 H8.1 H8.2 R11.2 TP9.1 TP11.1 U4.5 U8.6 | length 31.3
  Top Side w0.3: C10.2 v2(11.5,42.7) ; H8.1 20.6,48.2 TP9.1 ; U4.5 13.05,41.15 v2(11.5,42.7) ; TP11.1@17.9,42.2 17.4,42.7 v2(11.5,42.7) ; DL1.2 42.9,51.4 v1(42.9,52.7) ; v1(51.4,51.2) 51.911,51.2 52.5,50.611 C29.1 52.75,49.55 52.75,48.9 52.85,48.8 U8.6
  Bottom Side w0.3: R11.2 38.65,52.5 38.85,52.7 v1(42.9,52.7)
3V3_RADIO: C15.2 R8.2 TP13.1 U6.5 | length 9.8
  Top Side w0.3: C15.2 v2(2.7,42.8) ; R8.2 v2(3.2,58.85) ; TP13.1 2.7,45.3 v2(2.7,42.8) ; U6.5 4.25,41.425 2.875,42.8 v2(2.7,42.8)
5V: C9.2 C14.2 C16.2 C28.1 H7.1 H7.2 H11.1 L1.2 TP14.1 U4.1 U4.3 U5.5 U6.1 U6.3 U8.1 | length 45.5
  Top Side w0.3: C14.2 2.466,36.534 3.066,36.534 v2(3.2,36.4) ; U6.1 4.25,37.45 v2(3.2,36.4) ; U6.3 6.15,37.175 5.375,36.4 v2(3.2,36.4) ; C9.2 10.15,37 10.75,36.4 v2(11.9,36.4) ; U4.1 13.05,37.725 11.9,36.575 v2(11.9,36.4) ; U4.3 14.95,37.175 14.175,36.4 v2(11.9,36.4) ; H7.1 49.74,41.44 C28.1 52.2,44.725 52.85,45.375 U8.1 ; v1(56.8,43.8) 56.934,43.934 56.934,44.634 57.8,45.5 H11.1
  Top Side w2: TP14.1 2.9,16.5 L1.2 3,26.4 v2(3,29.5) ; U5.5@16.689,27.539 17.75,28.6 v2(17.75,29.05) C16.2
A_IN1: U2.16 U3.15 | length 46.5
  Top Side w0.3: U3.15 28.75,63.001 28.4,62.651 28.4,61.168 29.25,60.318 29.25,58.881 28,57.631 28,55.888 27.825,55.713 27.825,50.723 28.75,49.798 28.75,46.916 28.65,46.816 28.65,44.613 28.8,44.463 28.8,22.375 29.625,21.55 U2.16
A_IN2: U2.15 U3.13 | length 50.3
  Top Side w0.3: v1(29.2,67.2) 29.2,67.01 29.725,66.485 29.725,65.55 U3.13 ; v1(29.45,46.35) 29.45,22.375 30.275,21.55 U2.15
  Bottom Side w0.3: v1(29.2,67.2) 29.2,63.331 30,62.531 30,59.631 28,57.631 28,55.034 29.45,53.584 v1(29.45,46.35)
A_OUT1: H1.2 TP5.1 U2.2 | length 19.2
  Top Side w0.5: U2.2 30.275,13.175 28.924,11.824 28.924,7.676 31.7,4.9 33.4,4.9 33.8,5.3 H1.2 33.8,9.8 TP5.1
A_OUT2: H1.1 TP6.1 U2.4 | length 10.3
  Top Side w0.5: U2.4 31.575,14.238 31.55,14.213 31.55,10.85 TP6.1 30.7,7.95 H1.1
B_IN1: U2.9 U3.23 | length 57.1
  Top Side w0.3: v1(21.6,60.7) 23.21,60.7 23.51,61 24.431,61 24.681,60.75 U3.23 ; v1(27.1,21.5) 27.1,30.762 27.8,31.462 27.8,40.724 27.75,40.774 27.75,47.386 27.5,47.636 v1(27.5,48.6) ; U2.9 34.641,21.366 35.366,21.366 v1(35.5,21.5)
  Bottom Side w0.3: v1(21.6,60.7) 21.6,54.5 v1(27.5,48.6) ; v1(27.1,21.5) v1(35.5,21.5)
B_IN2: U2.10 U3.16 | length 56.1
  Top Side w0.3: v1(28,29.8) 28,31.026 28.25,31.276 28.25,40.911 28.2,40.961 28.2,47.002 28.3,47.102 28.3,49.458 27.375,50.383 27.375,55.899 27.55,56.074 27.55,57.818 28.8,59.068 28.8,60.131 27.95,60.981 27.95,62.838 28.25,63.138 U3.16 ; U2.10 33.525,21.55 35.9,23.925 v1(35.9,30.5)
  Bottom Side w0.3: v1(28,29.8) 28.7,30.5 v1(35.9,30.5)
B_OUT1: H2.2 TP7.1 U2.7 | length 16.7
  Top Side w0.5: U2.7 33.625,15.2 33.625,14.422 34.547,13.5 39.95,13.5 43.95,9.5 H2.2
B_OUT2: H2.1 TP8.1 U2.5 | length 15
  Top Side w0.5: U2.5 32.225,14.522 33.947,12.8 36.4,12.8 TP8.1 42.7,6.5 H2.1
BAT_VDIV: R7.2 R10.1 U3.14 | length 39.4
  Top Side w0.3: R7.2 22.85,32.4 R10.1 26.4,35.95 26.4,45.624 25.1,46.924 25.1,50.9 v1(25.9,51.7) ; v1(29.2,62.2) 29.25,62.25 U3.14
  Bottom Side w0.3: v1(25.9,51.7) 27.1,52.9 27.1,60.7 28.6,62.2 v1(29.2,62.2)
BUMPER: H10.1 U3.34 | length 58.4
  Top Side w0.3: U3.34 28.75,50.509 29.3,49.959 29.3,47.638 30.3,46.638 v1(30.3,43.6) ; v1(34.1,77) 34.2,77.1 H10.1
  Bottom Side w0.3: v1(30.3,43.6) 29.35,44.55 28.014,44.55 20.05,52.514 20.05,63.25 20.4,63.6 20.7,63.6 v1(34.1,77)
BUTTON: S?.1 U3.44 | length 15.6
  Top Side w0.3: U3.44 33.75,50.681 34.55,49.881 34.55,46.05 v1(35.4,45.2) ; v1(38.4,43.3) 38.4,45.05 S?.1
  Bottom Side w0.3: v1(35.4,45.2) 36.5,45.2 v1(38.4,43.3)
COM_CE: U3.29 U7.3 | length 26.5
  Top Side w0.3: U7.3@4.243,67.2 4.243,65.489 11.982,57.75 U3.29@25.875,57.75
COM_CSN: U3.28 U7.4 | length 25.4
  Top Side w0.3: U7.4@5.514,67.2 5.514,64.854 12.119,58.25 U3.28@25.875,58.25
COM_IRQ: U3.30 U7.8 | length 25.2
  Top Side w0.3: v2(10.5,57.2) U3.30@25.825,57.2 ; v2@10.6,62.1 U7.8@10.6,67.2
  Bottom Side w0.3: v2(10.5,57.2) v2(10.5,62)
D_N: 1.2 R3.1 | length 10.6
  Top Side w0.381: R3.1 51.8,74.65 57.3,80.15 1.2
D_P: 1.3 R2.1 | length 8.6
  Top Side w0.381: R2.1 53.727,74.377 53.727,74.633 58.584,79.491 58.841,79.491 58.85,79.5 1.3
DIP_0: S3.1 U3.19 | length 29.1
  Top Side w0.3: S3.1 17.8,80.33 17.317,79.847 16.683,79.847 16.2,79.364 16.2,72.836 16.376,72.66 23.357,72.66 27.55,68.467 27.55,63.074 27.251,62.775 26.5,62.775 U3.19
DIP_1: S3.2 U3.9 | length 20.3
  Top Side w0.3: S3.2 18.5,78.64 20.59,76.55 21.376,76.55 25.266,72.66 26.244,72.66 31.75,67.154 U3.9
DIP_2: S3.3 U3.10 | length 18.7
  Top Side w0.3: S3.3 21.189,76.1 25.718,71.571 26.696,71.571 31.25,67.018 U3.10
DIP_3: S3.4 U3.11 | length 17.1
  Top Side w0.3: S3.4 23.093,73.56 26.42,70.233 27.398,70.233 30.75,66.881 U3.11
GND: 1.5 1.6 2.5 2.6 C1.1 C3.1 C4.1 C6.1 C7.1 C8.1 C9.1 C10.1 C11.1 C13.1 C14.1 C15.1 C16.1 C17.1 C18.2 C19.1 C20.2 C21.1 C22.2 C23.1 C24.2 C25.1 C27.1 C28.2 C29.2 D2.1 H5.1 H5.2 H5.3 H5.4 H9.1 H9.3 H10.2 H11.3 R4.1 R6.1 R10.2 R14.2 S1.2 S3.5 S3.6 S3.7 S3.8 S?.2 SW1.4 U1.3 U1.6 U1.13 U1.17 U2.3 U2.6 U2.13 U2.17 U3.2 U3.17 U3.46 U3.60 U4.2 U5.7 U5.EPAD U6.2 U7.2 U8.2 U8.5 | length 181.7
  Top Side w0.3: C14.1 1.85,39.05 2.161,39.05 2.411,39.3 2.6,39.3 ; C15.1 2.6,39.3 ; U7.2 v2(2.957,64.957) 4.973,62.941 4.973,62.527 C13.1 ; U6.2 5.2,38.725 4.625,39.3 v2(3.3,39.3) 2.6,39.3 ; C9.1 11,39.3 v2(12,39.3) ; C10.1 11.3,40 v2(12,39.3) ; SW1.4 13.55,51.05 v1(13.6,51) ; H9.1 14.31,3.25 R6.1 ; U4.2 14,38.725 13.425,39.3 v2(12,39.3) ; 14.5,31.65 v1(14.5,27.8) 14.5,27.715 15.129,27.086 15.129,26.076 15.91,25.296 16.258,25.296 U5.7 ; v1(19.2,34.7) 19.25,34.7 R10.2 ; C19.1 21.8,63.35 23.05,64.6 v1(24.8,64.6) 24.8,64.536 25.44,63.896 25.44,63.75 U3.17 ; S3.5 27.76,73.56 v1(29.3,75.1) 29.111,75.1 28.561,75.65 27.15,75.65 S3.6 ; S3.7 29.14,78.64 v1(29.9,79.4) ; S3.8 28.25,81.18 29.9,79.53 v1(29.9,79.4) ; C6.1 v2(30.7,26.8) 31.7,26.8 C4.1 ; U2.3 30.925,15.95 31.425,16.45 33.375,16.45 ; U2.13 31.575,20.25 32.175,19.65 33.725,19.65 v2(35.275,18.1) ; v3(31.9,18.1) v2(35.275,18.1) ; U2.6 32.875,15.95 33.375,16.45 ; H10.2 v1(29.9,79.4) ; v1(34.7,56.7) 34.75,56.65 U3.46 ; U3.60 37.5,61.775 36.749,61.775 36.45,62.074 36.45,63.926 37.374,64.85 38.45,64.85 v1(38.5,64.9) v1@38.623,65.023 ; 39.8,65.6 39.223,65.023 v1@38.623,65.023 ; C7.1 38.634,65.834 38.634,65.034 v1@38.623,65.023 ; C3.1 v2(41.3,26.6) 42.6,26.6 C1.1 ; C8.1 42.85,71.75 43.75,71.75 v1(43.8,71.8) R4.1 ; U1.3 42.3,15.65 U1.17@43.862,17.212 ; U1.13 42.95,19.95 43.55,19.35 44.9,19.35 v2@46.45,17.8 ; S?.2 44.15,43.9 v1(45.6,43.9) 46.4,44.7 S1.2 ; v3(43.275,17.8) v2@46.45,17.8 ; U1.6 44.25,15.65 46.166,17.566 46.416,17.566 v2(46.55,17.7) v2@46.45,17.8 ; C27.1 51.9,53.5 ; R14.2 51.727,53.923 51.727,53.673 51.9,53.5 ; H5.4 53.6,37.7 C28.2 53.8,44.1 U8.2 ; U8.5 53.8,49.7 C29.2 v1(53.9,51.5) 51.9,53.5 ; v1@54.103,51.703 57.805,48 H11.3 ; 33.375,16.45 33.625,16.45 v2(35.275,18.1)
  Top Side w1.5: v2(24.9,1.9) 25.9,1.9 C11.1
  Top Side w2: D2.1 6.525,13.475 v2(11.06,8.94) H9.3 H9.3@13.694,8.946 ; v2(11.06,3.86) H9.1
  Bottom Side w0.3: C22.2 24.8,62.7 v1(24.8,64.6) ; C20.2 31.377,67.477 31.377,67.78 32,68.403 v1(32,68.5) v1@32.1,68.4 ; C18.2 v1@32.1,68.4 ; C17.1 32.823,67.377 32.823,67.677 v1@32.1,68.4 ; v1(34.7,56.7) 35.78,55.62 36.754,55.62 37.7,54.674 37.7,54.276 37.876,54.1 C21.1 ; C24.2 v1@40.2,58.8 ; C23.1 39.077,60.123 39.077,59.923 v1@40.2,58.8 ; v1(40.3,58.7) v1@40.2,58.8
  other v4: 19,25.5
L_IN1: U1.16 U3.42 | length 37.6
  Top Side w0.3: U3.42 32.75,50.882 32.4,50.532 32.4,49.412 32.9,48.913 32.9,44.1 34.5,42.5 v2(34.5,40.7) ; v2(38.7,30) 38.7,23.55 41,21.25 U1.16
  Bottom Side w0.3: v2(34.5,40.7) 34.5,34.2 v2(38.7,30)
L_IN2: U1.15 U3.41 | length 41.2
  Top Side w0.3: v2(32.25,41.95) 32.25,42.139 32.45,42.339 32.45,47.033 31.95,47.533 31.95,50.719 32.25,51.019 U3.41 ; v2(40.6,29.9) 40.5,29.8 40.5,22.4 41.65,21.25 U1.15 41.65,19.95 41.2,19.5 40.8,19.5
  Bottom Side w0.3: v2(32.25,41.95) 34.381,41.95 40.6,35.731 v2(40.6,29.9)
L_OUT1: H4.2 TP3.1 U1.7 | length 15.5
  Top Side w0.5: U1.7 44.9,14.222 45.322,13.8 49.25,13.8 51.95,16.5 TP3.1 54.9,18.7 H4.2
L_OUT2: H4.1 TP4.1 U1.5 | length 17.4
  Top Side w0.5: U1.5 43.7,14.9 43.7,14.122 44.672,13.15 50.25,13.15 50.8,12.6 TP4.1 57.4,17.2 H4.1
LED_STRIP_3V3: U3.43 U8.4 | length 28.9
  Top Side w0.3: v1(33.2,50.1) 33.25,50.15 U3.43 ; U8.4 54.75,48.225 54.925,48.4 55.5,48.4 v1(55.5,49.1)
  Bottom Side w0.3: v1(33.2,50.1) 34.2,49.1 v1(55.5,49.1)
LED_STRIP_5V: H11.2 U8.3 | length 3.9
  Top Side w0.3: U8.3 56,45.6 57.15,46.75 H11.2
MOTOR_ENABLE: U1.1 U3.52 | length 57.3
  Top Side w0.3: U3.52 37.5,57.725 36.749,57.725 36.3,57.276 36.3,51.874 36.3,43.5 47.85,31.95 47.85,21.4 47.734,21.284 47.734,20.534 v1(47.6,20.4) ; v1(39.7,15.1) 40.9,15.1 U1.1
  Bottom Side w0.3: v1(39.7,15.1) 39.7,16.795 39.3,17.195 39.3,18.7 41,20.4 v1(47.6,20.4)
MOTOR_ENABLE2: U2.1 U3.25 | length 52.2
  Top Side w0.3: v1(25.9,48.6) 27.3,47.2 27.3,31.599 26.35,30.649 26.35,24.419 26.3,24.369 26.3,18.625 U2.1 ; U3.25 27.95,59.75 v1(28,59.8)
  Bottom Side w0.3: v1(25.9,48.6) 25.9,48.5 26.6,47.8 27.831,47.8 28.3,48.269 28.3,52.3 27.55,53.05 27.55,57.818 28,58.268 v1(28,59.8)
MOTOR_FAULT: U1.8 U3.26 | length 69.2
  Top Side w0.3: v1(22.7,59.7) 22.834,59.566 23.602,59.566 23.918,59.25 U3.26 ; v1(35,44) 46.95,32.05 46.95,22.303 46.8,22.153 46.8,19.751 47.35,19.201 47.35,16.8 U1.8
  Bottom Side w0.3: v1(22.7,59.7) 22.7,60.731 21.931,61.5 20.9,61.5 20.6,61.2 20.6,55.2 20.5,55.1 20.5,52.7 26.3,46.9 27.05,46.9 28.95,45 34,45 v1(35,44)
MOTOR_FAULT2: U2.8 U3.36 | length 43.8
  Top Side w0.3: U3.36 29.75,52.26 29.5,52.01 29.5,50.396 29.75,50.146 29.75,47.824 31.1,46.474 31.1,43.269 30.55,42.719 30.55,41.182 36.7,35.032 36.7,24.566 36.5,24.366 36.5,17.625 U2.8
NetC2_1: C2.1 U1.11 | length 3
  Top Side w0.3: U1.11 44.25,21.662 44.487,21.899 44.487,22.387 C2.1
NetC3_2: C3.2 U1.14 | length 3.3
  Top Side w0.3: C3.2 42.3,22.5 U1.14
NetC5_1: C5.1 U2.11 | length 3.5
  Top Side w0.3: U2.11 32.875,21.962 33.199,22.286 33.199,22.999 C5.1
NetC6_2: C6.2 U2.14 | length 2.4
  Top Side w0.3: C6.2@30.9,23.3 30.9,20.925 U2.14
NetC7_2: C7.2 U3.62 Y1.3 | length 15
  Top Side w0.3: U3.62 43.524,62.75 43.9,63.126 43.9,65.274 42.9,66.274 Y1.3 42.023,67.723 41.873,67.723 41.2,67.05 C7.2 C7.2@41.3,67.1
NetC8_2: C8.2 U3.61 Y1.1 | length 16.3
  Top Side w0.3: U3.61 43.661,62.25 44.35,62.939 44.35,63 45.3,63.95 Y1.1 44.35,65.15 44.35,65.461 44,65.811 44,69.75 43.45,70.3 C8.2
NetC12_1: C12.1 U5.1 | length 2.9
  Top Side w0.3: C12.1 21.311,23.011 U5.1
NetC12_2: C12.2 D2.2 L1.1 U5.8 | length 16.2
  Top Side w0.3: L1.1 14.805,23.595 U5.8 16.689,23.011 C12.2 13.475,16.575 D2.2
NetC13_2: C13.2 R8.1 U7.1 | length 9.7
  Top Side w0.3: U7.1 1.686,63.064 R8.1 2.8,63.05 4.923,60.927 4.973,60.927 C13.2
NetC17_2: C17.2 C19.2 C21.2 C23.2 C25.2 R11.1 U3.1 U3.7 U3.18 U3.45 U3.58 | length 34.4
  Top Side w0.3: C19.2 26.425,63.3 U3.18 ; U3.7 32.75,64.49 33.09,64.15 33.09,63.31 v1(33.2,63.2) 33.2,63.057 32.6,62.457 32.6,57.16 34.25,55.51 U3.45 ; U3.1 36.436,65.525 37.011,66.1 v1(37.2,66.1) ; v1(36,60.7) 36.05,60.75 U3.58 U3.58@37.575,60.7
  Bottom Side w0.3: v1(33,56.7) 35.023,54.677 36.423,54.677 C21.2 36.95,54.05 R11.1 ; C17.2 33.2,65.2 v1(33.2,63.2) 34.051,62.349 34.051,62.117 35.335,60.834 35.866,60.834 v1(36,60.7) C23.2 ; C25.2 36.5,65.4 v1(37.2,66.1)
NetC18_1: C18.1 C20.1 C22.1 C24.1 L2.2 U3.8 U3.12 U3.24 U3.54 | length 38.6
  Top Side w0.3: v1(24.1,60.2) 24.134,60.234 25.424,60.234 25.44,60.25 U3.24 ; v1@30.25,63.95 v1(30.2,63.9) 30.2,65.475 U3.12 ; v1(31.8,63.9) 31.8,64.089 32.225,64.514 32.225,65.5 U3.8 ; v1(36,58.8) 36.05,58.75 U3.54 37.55,58.725 38.437,58.725 40.5,56.662 L2.2
  Bottom Side w0.3: v1(24.1,60.2) 24.772,60.872 24.772,61.222 28.4,64.85 28.4,66.191 28.4,67.531 28.869,68 29.531,68 30,67.531 30,66.426 30.226,66.2 30.624,66.2 30.8,66.024 C20.1 30.2,64.9 v1(30.2,63.9) ; C18.1 32.3,65.2 31.8,64.7 v1(31.8,63.9) 31.85,63.85 31.85,62.95 v1(36,58.8) C24.1
NetC26_1: C26.1 C27.2 L2.1 U3.64 | length 20.1
  Top Side w0.3: U3.64 39.25,63.75 39.3,63.8 v1(41.2,63.8) ; v1(43.2,56.7) 43.334,56.566 43.334,55.916 43.5,55.75 L2.1 46.4,54.6 ; C26.1 46.4,54.6 ; C27.2 46.6,54.6 46.4,54.6
  Bottom Side w0.3: v1(41.2,63.8) 43.2,61.8 v1(43.2,56.7)
NetC26_2: C26.2 R14.1 | length 2.6
  Top Side w0.3: C26.2 49.35,55.7 R14.1
NetDL1_1: DL1.1 R12.1 | length 4.1
  Top Side w0.3: R12.1 DL1.1
NetDL2_1: DL2.1 R13.1 | length 4.1
  Top Side w0.3: R13.1 41.1,48.5 DL2.1
NetF1_1: F1.1 Q1.3 | length 5.8
  Top Side w2: F1.1 20.55,9.5 Q1.3
NetH6_1: H6.1 U3.3 | length 26.9
  Top Side w0.3: U3.3 34.775,65.55 34.775,66.301 35.774,67.3 36.309,67.3 42.252,73.242 46.634,73.242 53.316,79.924 54.264,79.924 H6.1
NetH6_2: H6.2 U3.4 | length 24.9
  Top Side w0.3: U3.4 34.275,65.55 34.275,66.437 35.588,67.75 36.123,67.75 42.065,73.692 45.492,73.692 H6.2
NetH6_3: H6.3 U3.5 | length 23
  Top Side w0.3: U3.5 33.775,65.55 33.775,66.574 35.401,68.2 35.936,68.2 41.879,74.142 43.402,74.142 H6.3
NetH6_4: H6.4 U3.6 | length 21
  Top Side w0.3: U3.6 33.25,66.685 35.215,68.65 35.35,68.65 36.5,69.8 36.52,69.8 H6.4
NetH6_5: H6.5 U3.33 | length 37.7
  Top Side w0.3: U3.33@28.275,54.9 28.275,55.251 28.666,55.642 28.666,56.366 v1(28.8,56.5) ; v1(33.4,58.3) 35.1,60 v1(35.1,62.2)
  Bottom Side w0.3: v1(28.8,56.5) 31.6,56.5 v1(33.4,58.3) ; v1(35.1,62.2) 34.95,62.35 34.95,73.946 40.7,79.696 40.7,80.652 41.774,81.725 43.654,81.725 H6.5
NetH6_6: H6.6 U3.49 | length 28.9
  Top Side w0.3: U3.49 38.125,56.25 38.15,56.225 38.15,55.739 38.3,55.589 v1(38.3,55.4)
  Bottom Side w0.3: v1(38.3,55.4) 41.1,58.2 41.1,60.9 40.4,61.6 40.4,78.76 H6.6
NetQ1_1: Q1.1 R6.2 | length 7.6
  Top Side w0.3: R6.2 18.227,5.277 19.802,5.277 22.025,7.5 Q1.1
NetR2_2: R2.2 U3.57 | length 24.5
  Top Side w0.3: U3.57 39.876,60.25 40.176,59.95 42.788,59.95 43.891,61.053 44.528,61.053 46.6,63.126 46.6,67.9 51.05,72.35 51.05,72.824 51.226,73 52.55,73 R2.2
NetR3_2: R3.2 U3.56 | length 22.4
  Top Side w0.3: U3.56 39.739,59.75 39.989,59.5 43.611,59.5 47.05,62.939 47.05,67.6 R3.2
NetR9_1: R9.1 U5.3 | length 2.4
  Top Side w0.3: U5.3 22.885,26.135 23,26.25 R9.1
NetTP10_1: TP10.1 U3.55 | length 9.2
  Top Side w0.3: U3.55 38.618,59.25 39.969,57.9 40.9,57.9 41.4,58.4 41.4,58.724 41.576,58.9 TP10.1@45.6,58.9
nRST: 2.1 S1.1 U3.39 | length 39.7
  Top Side w0.3: v1(31.2,51.1) 31.2,54.425 U3.39
  Bottom Side w0.3: v1(31.2,51.1) 43.349,51.1 56.635,64.386 56.635,66.926 57.294,67.585 57.76,67.585 2.1
R_IN1: U1.9 U3.38 | length 41.6
  Top Side w0.3: U3.38 30.75,51.988 30.4,51.638 30.4,50.769 30.75,50.419 30.75,48.097 32,46.847 32,42.896 31.45,42.346 31.45,41.619 46.5,26.569 46.5,22.489 46.061,22.05 45.938,22.05 45.55,21.662 U1.9
R_IN2: U1.10 U3.37 | length 41.7
  Top Side w0.3: U3.37 30.25,52.124 29.95,51.824 29.95,50.582 30.25,50.282 30.25,47.96 31.55,46.66 31.55,43.082 31,42.532 31,41.368 36.95,35.418 46.05,26.318 46.05,22.676 45.874,22.5 45.751,22.5 44.9,21.649 U1.10
R_OUT1: H3.2 TP1.1 U1.2 | length 20.2
  Top Side w0.5: U1.2 41.75,14.9 41.75,14.122 44.022,11.85 47.592,11.85 52.842,6.6 H3.2
R_OUT2: H3.1 TP2.1 U1.4 | length 28.8
  Top Side w0.5: U1.4 42.95,14.55 43.05,14.45 43.05,13.853 44.403,12.5 47.861,12.5 53.061,7.3 53.161,7.4 58.866,7.4 59.1,7.166 59.1,5.9 59,5.8 58.75,5.8 58.3,5.35 H3.1 56.15,5.35 TP2.1
SLEEP: SW1.2 U3.20 | length 20.6
  Top Side w0.3: SW1.2 13.35,55.55 v1(13.4,55.6) ; v1(18.3,63.2) 18.344,63.2 18.994,62.55 25.14,62.55 25.44,62.25 U3.20
  Bottom Side w0.3: v1(13.4,55.6) 18.3,60.5 v1(18.3,63.2)
SPI_MISO: U3.27 U7.7 | length 23.2
  Top Side w0.3: U7.7@9.329,67.2 9.329,61.771 12.35,58.75 U3.27@25.875,58.75